# EAGLE board fpga_board_test (EAGLE 9.5.1), part 1 of 2
VERSION: v3.3
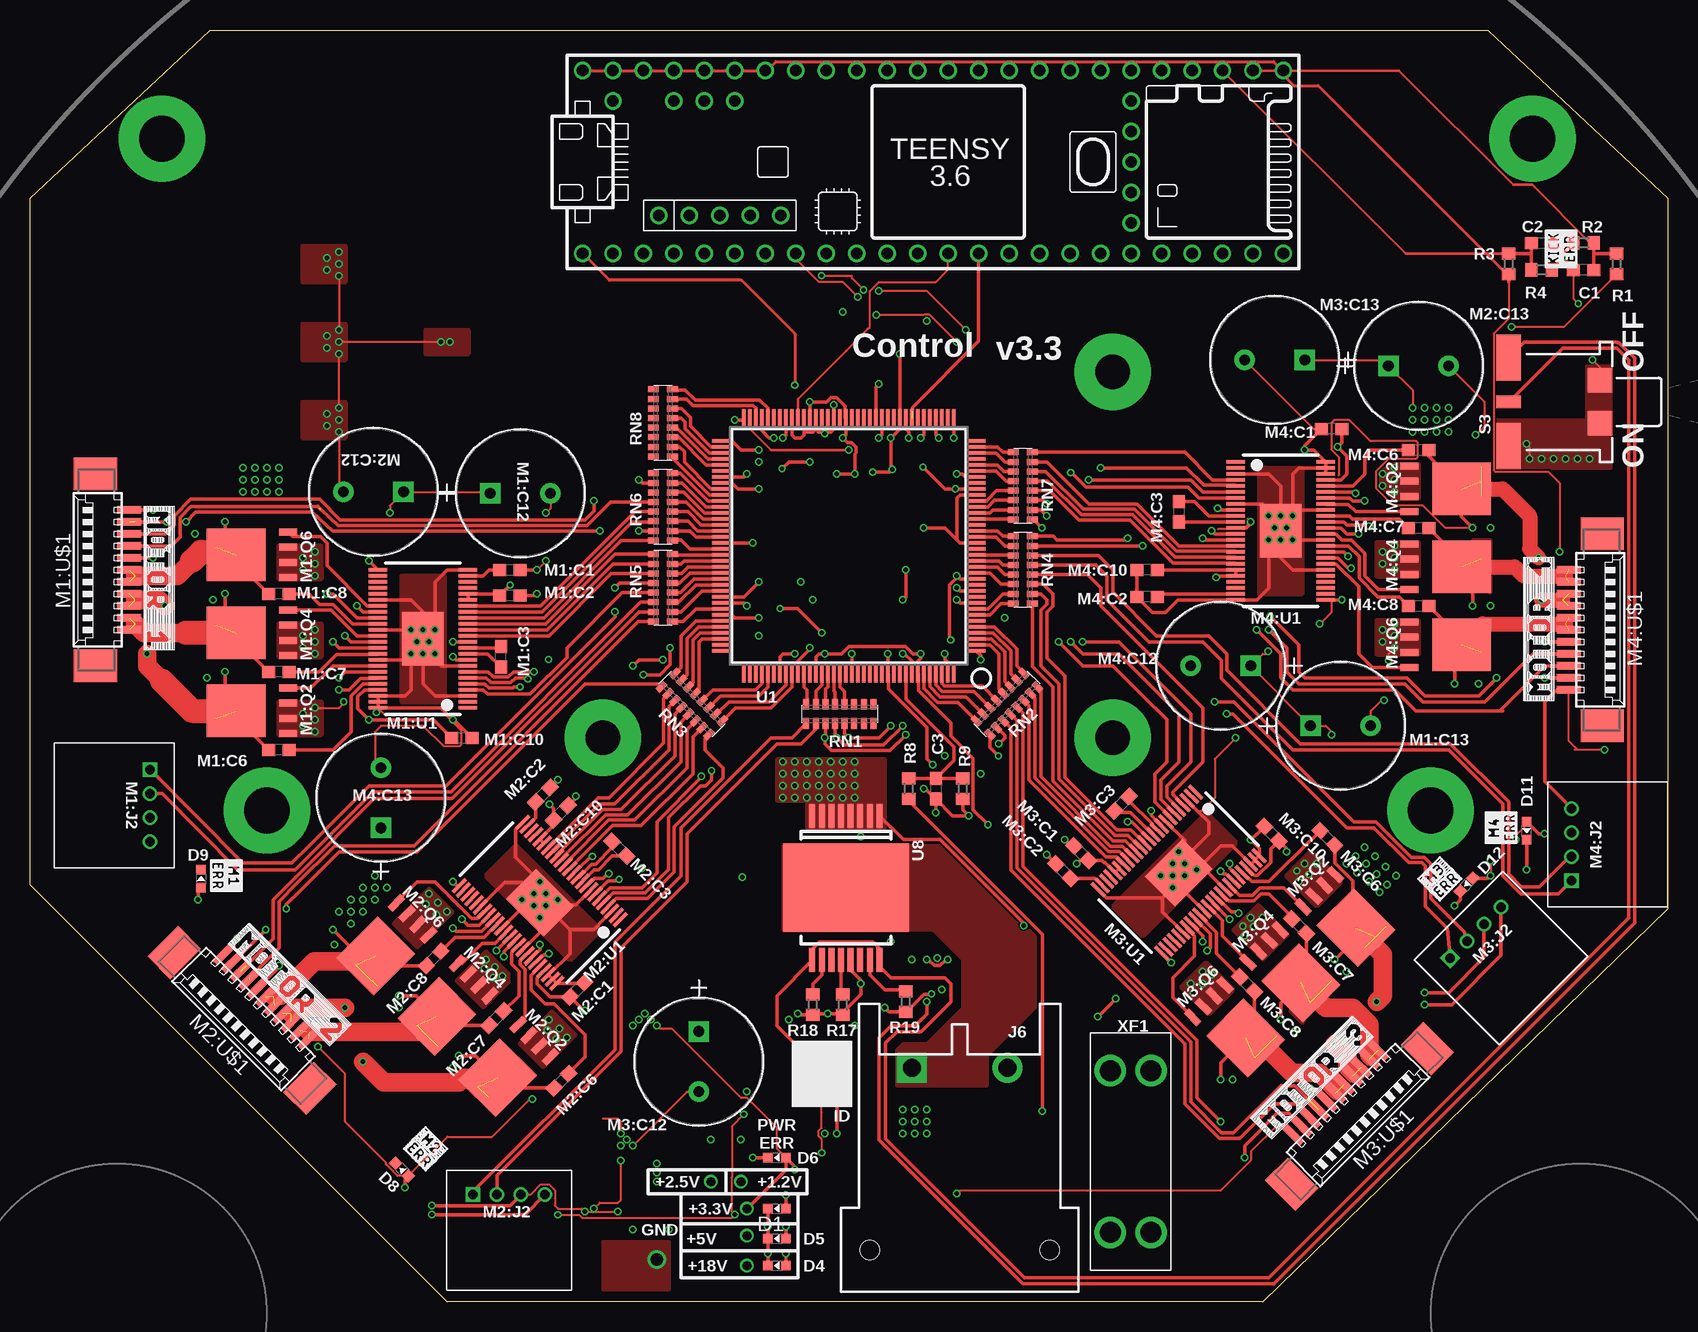
[diagram p0: board, top side]
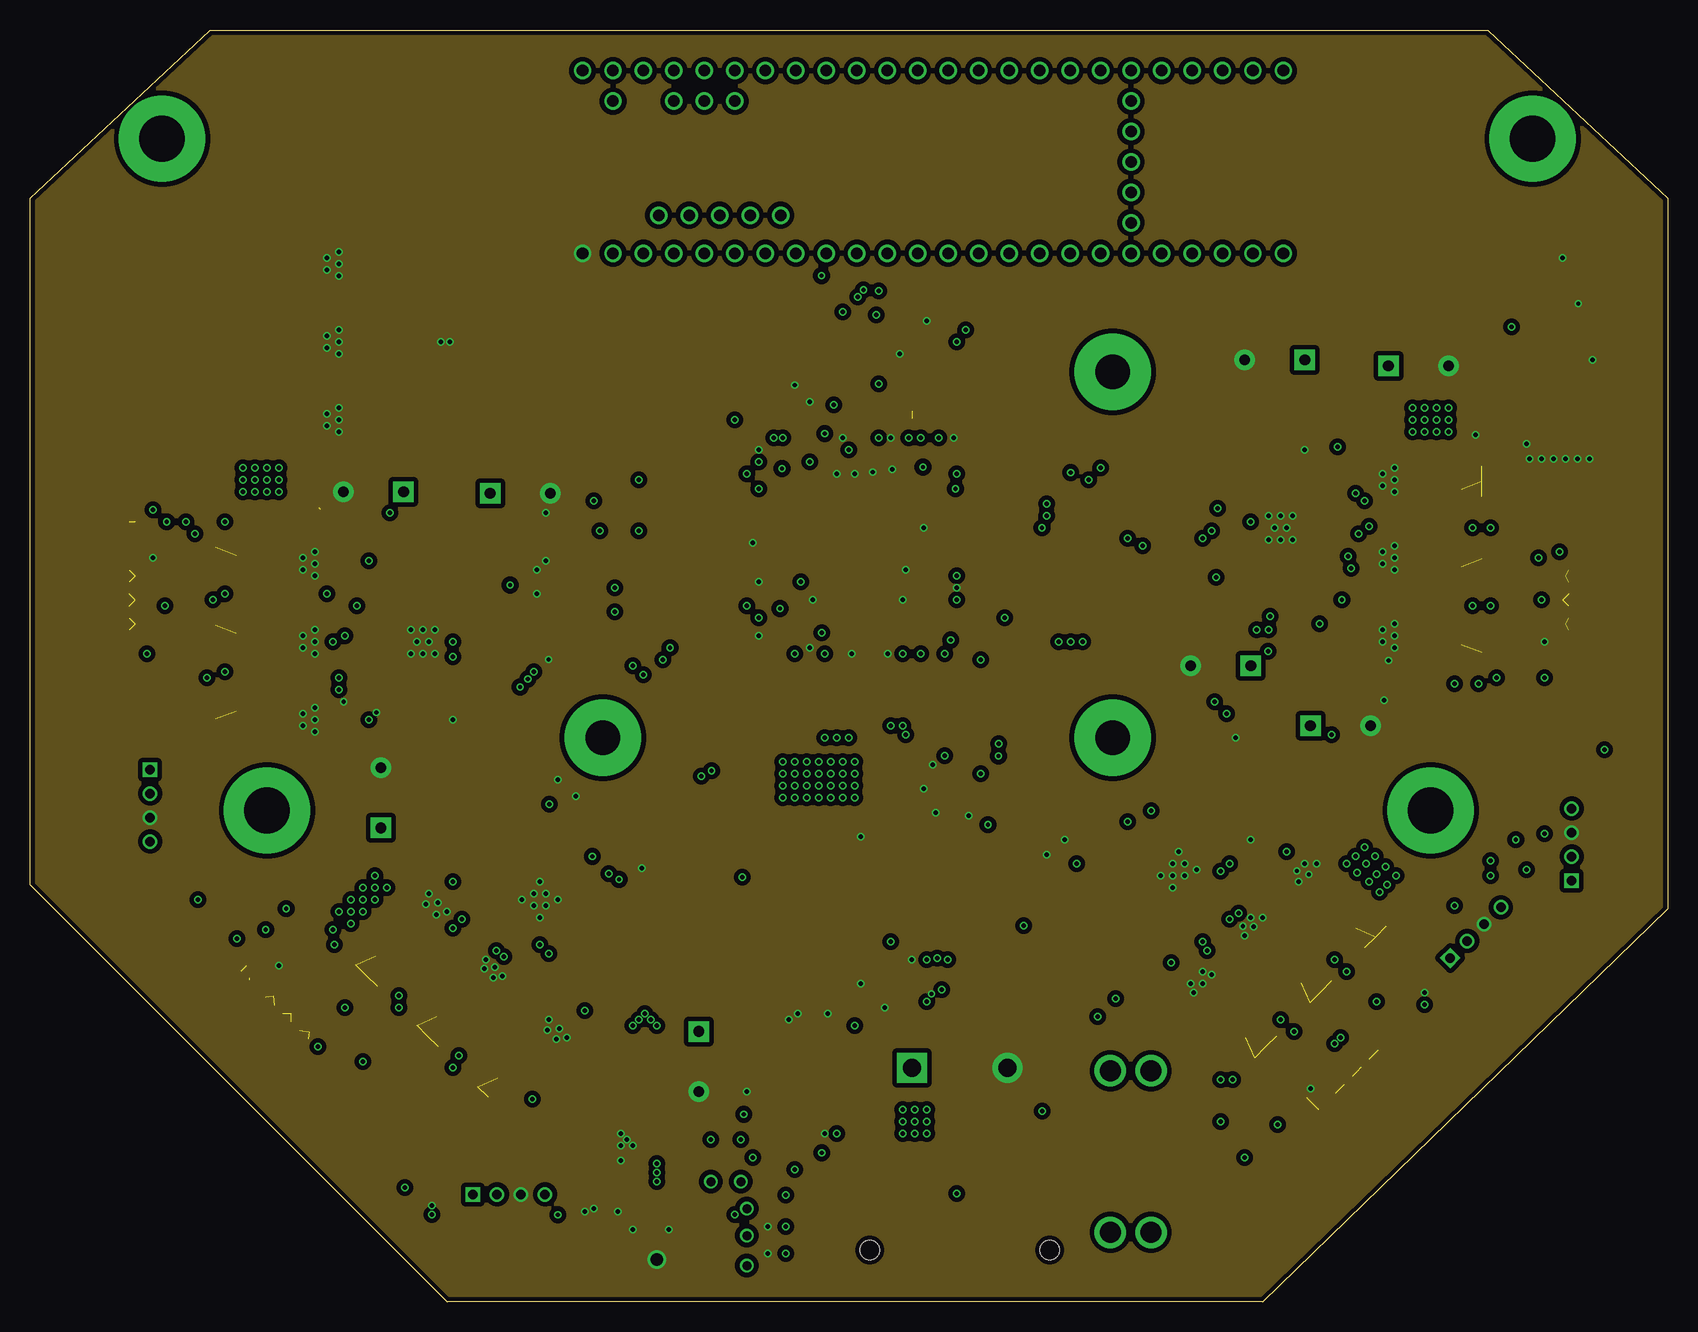
[diagram p1: board, inner layer GND]
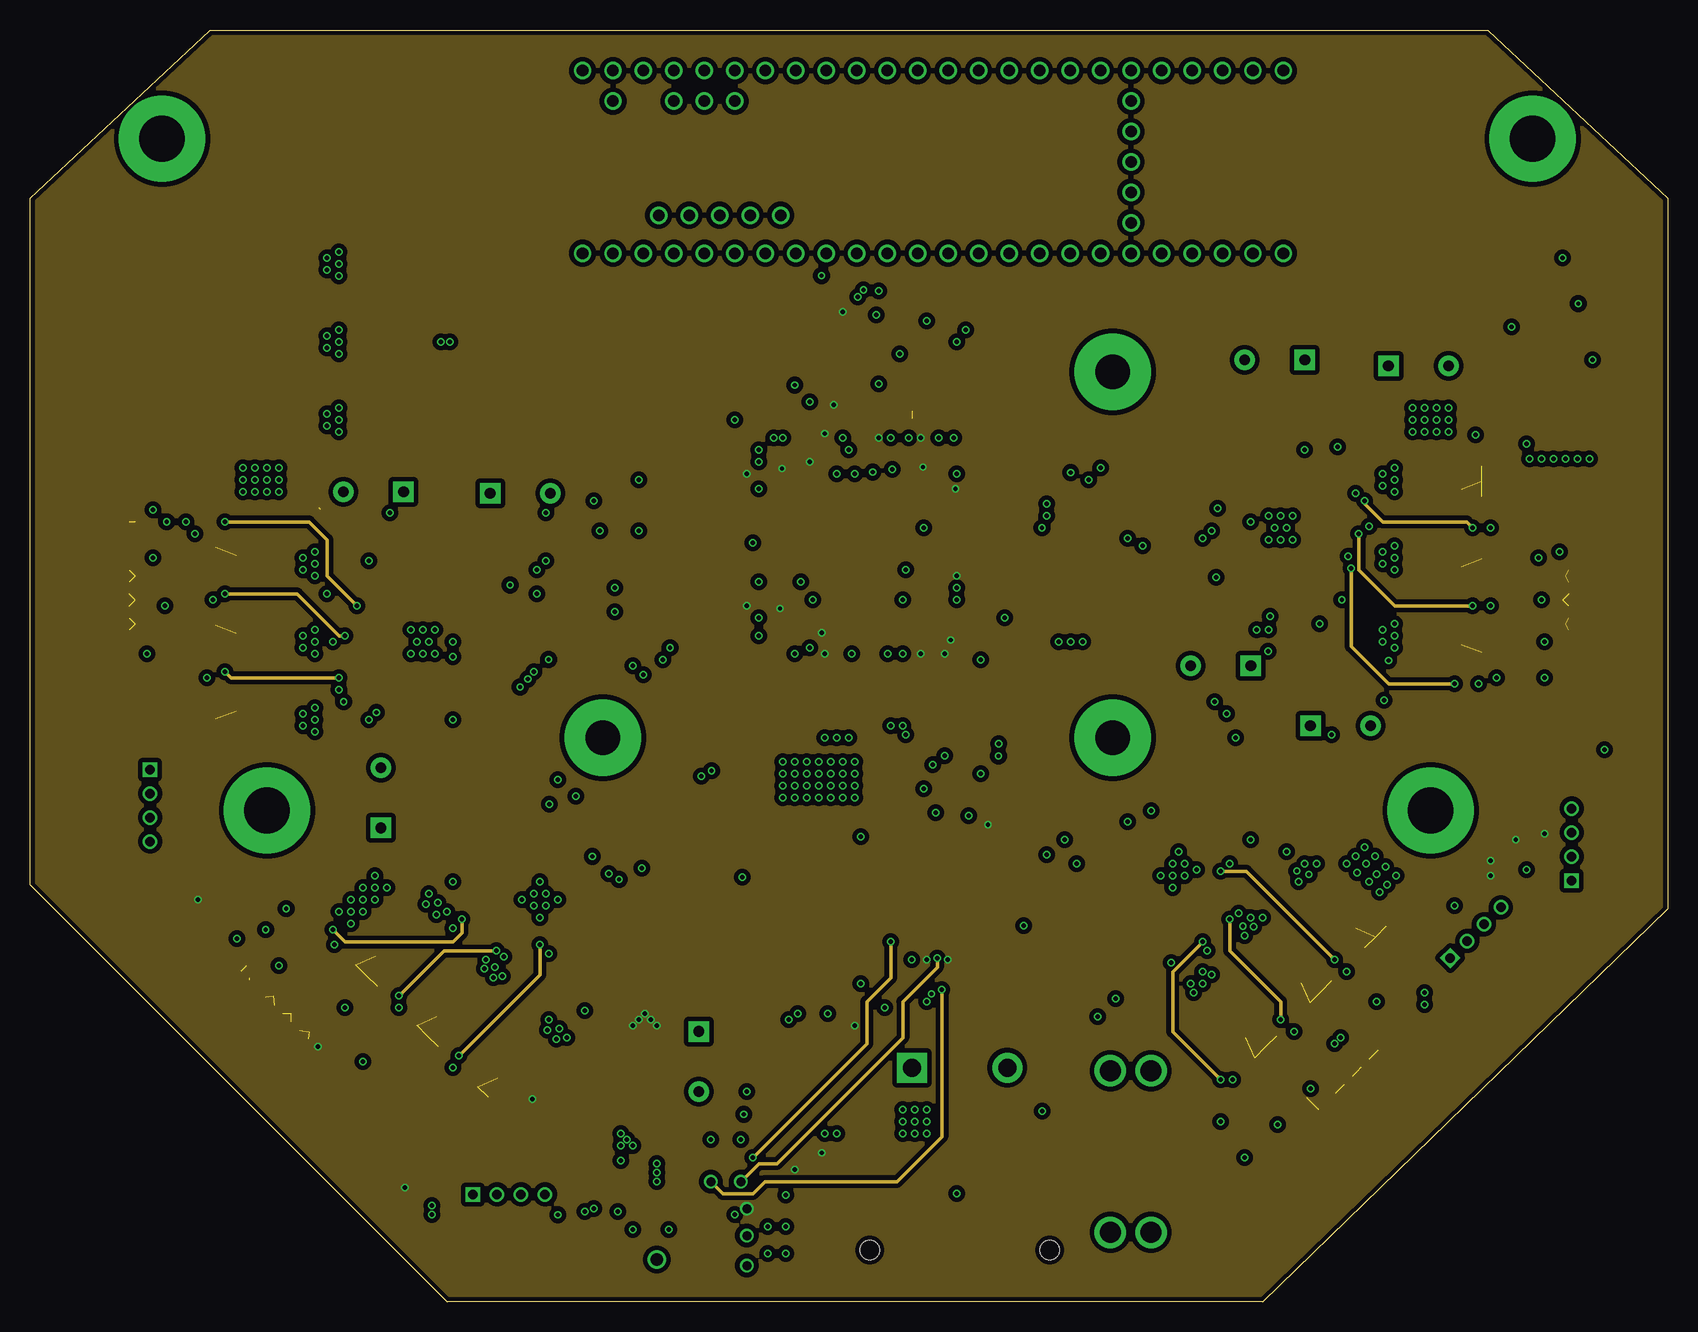
[diagram p2: board, inner layer 3v3]
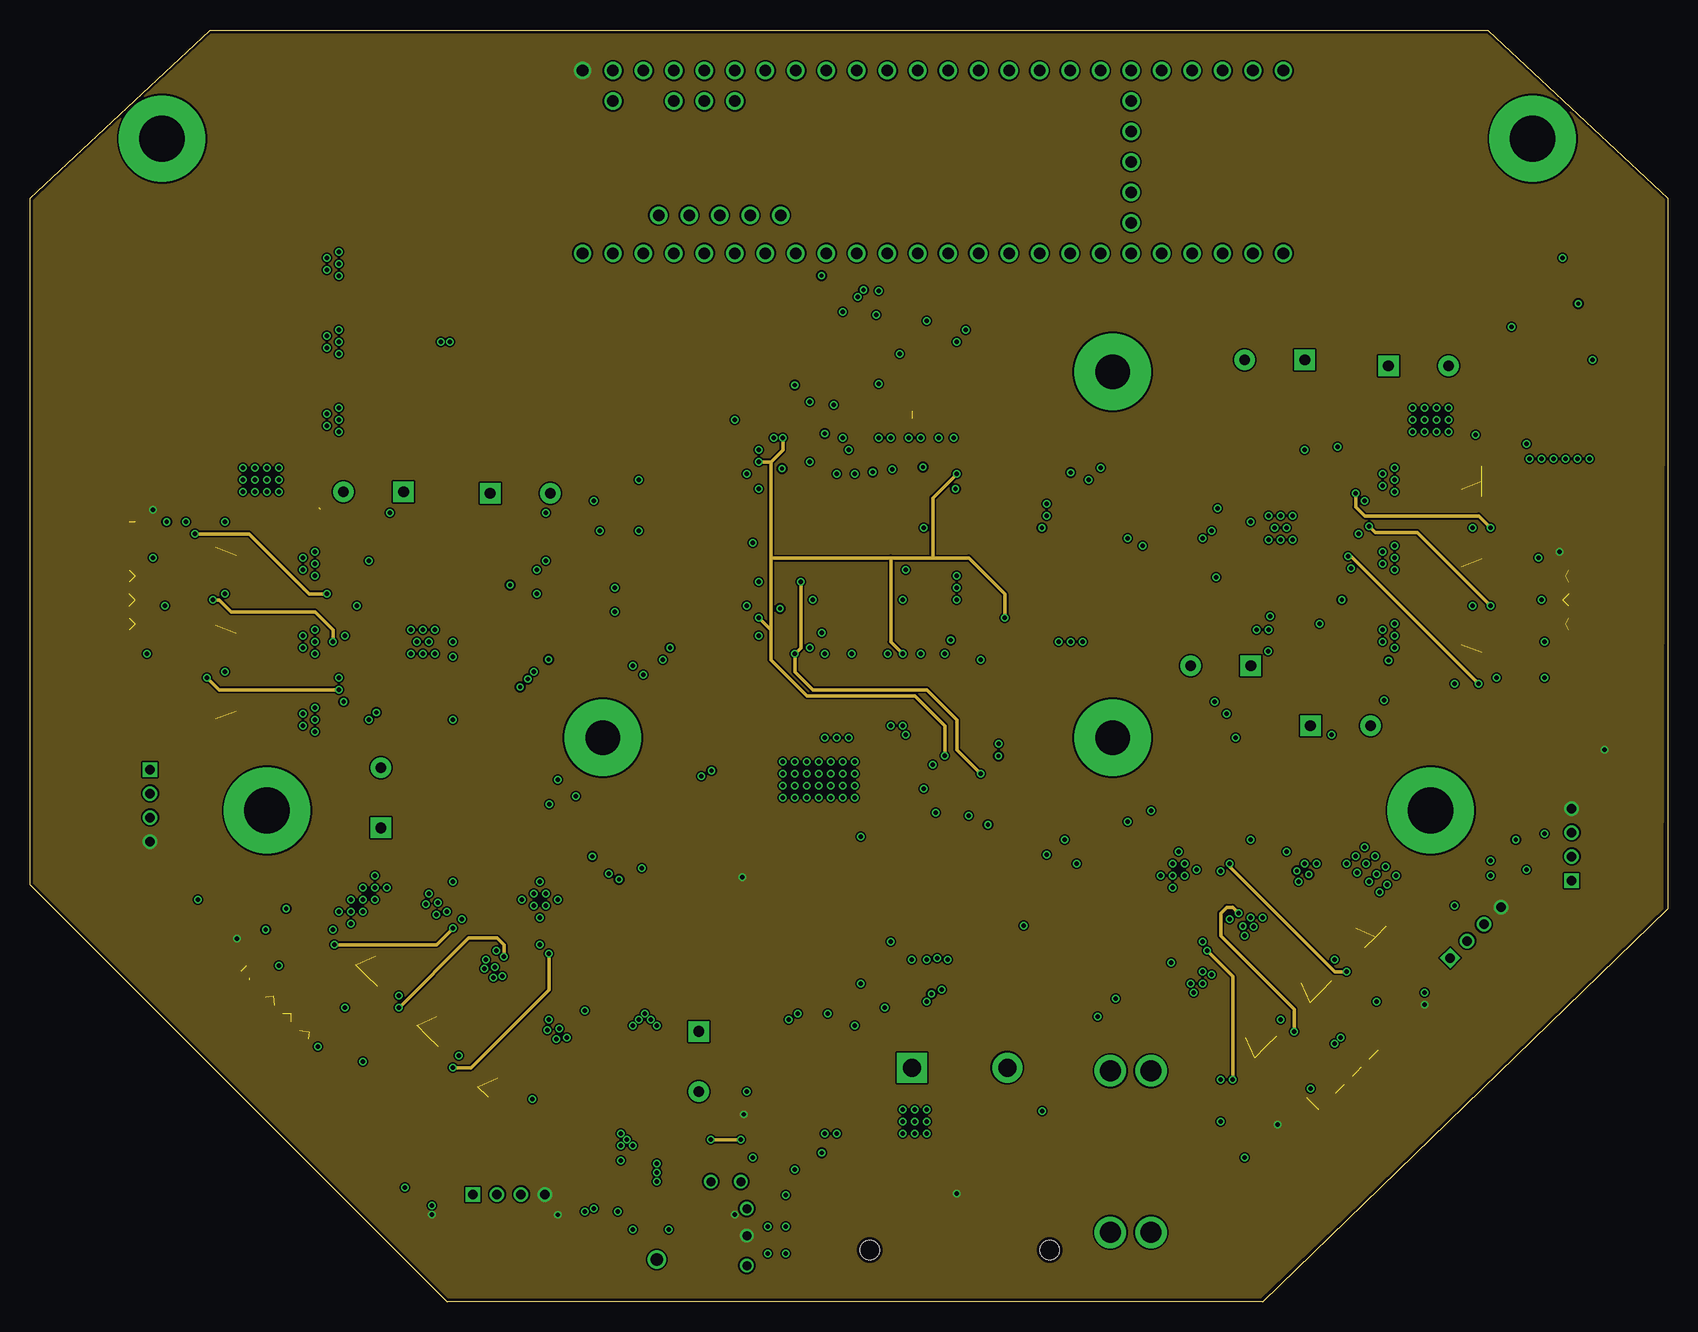
[diagram p3: board, inner layer 5v]
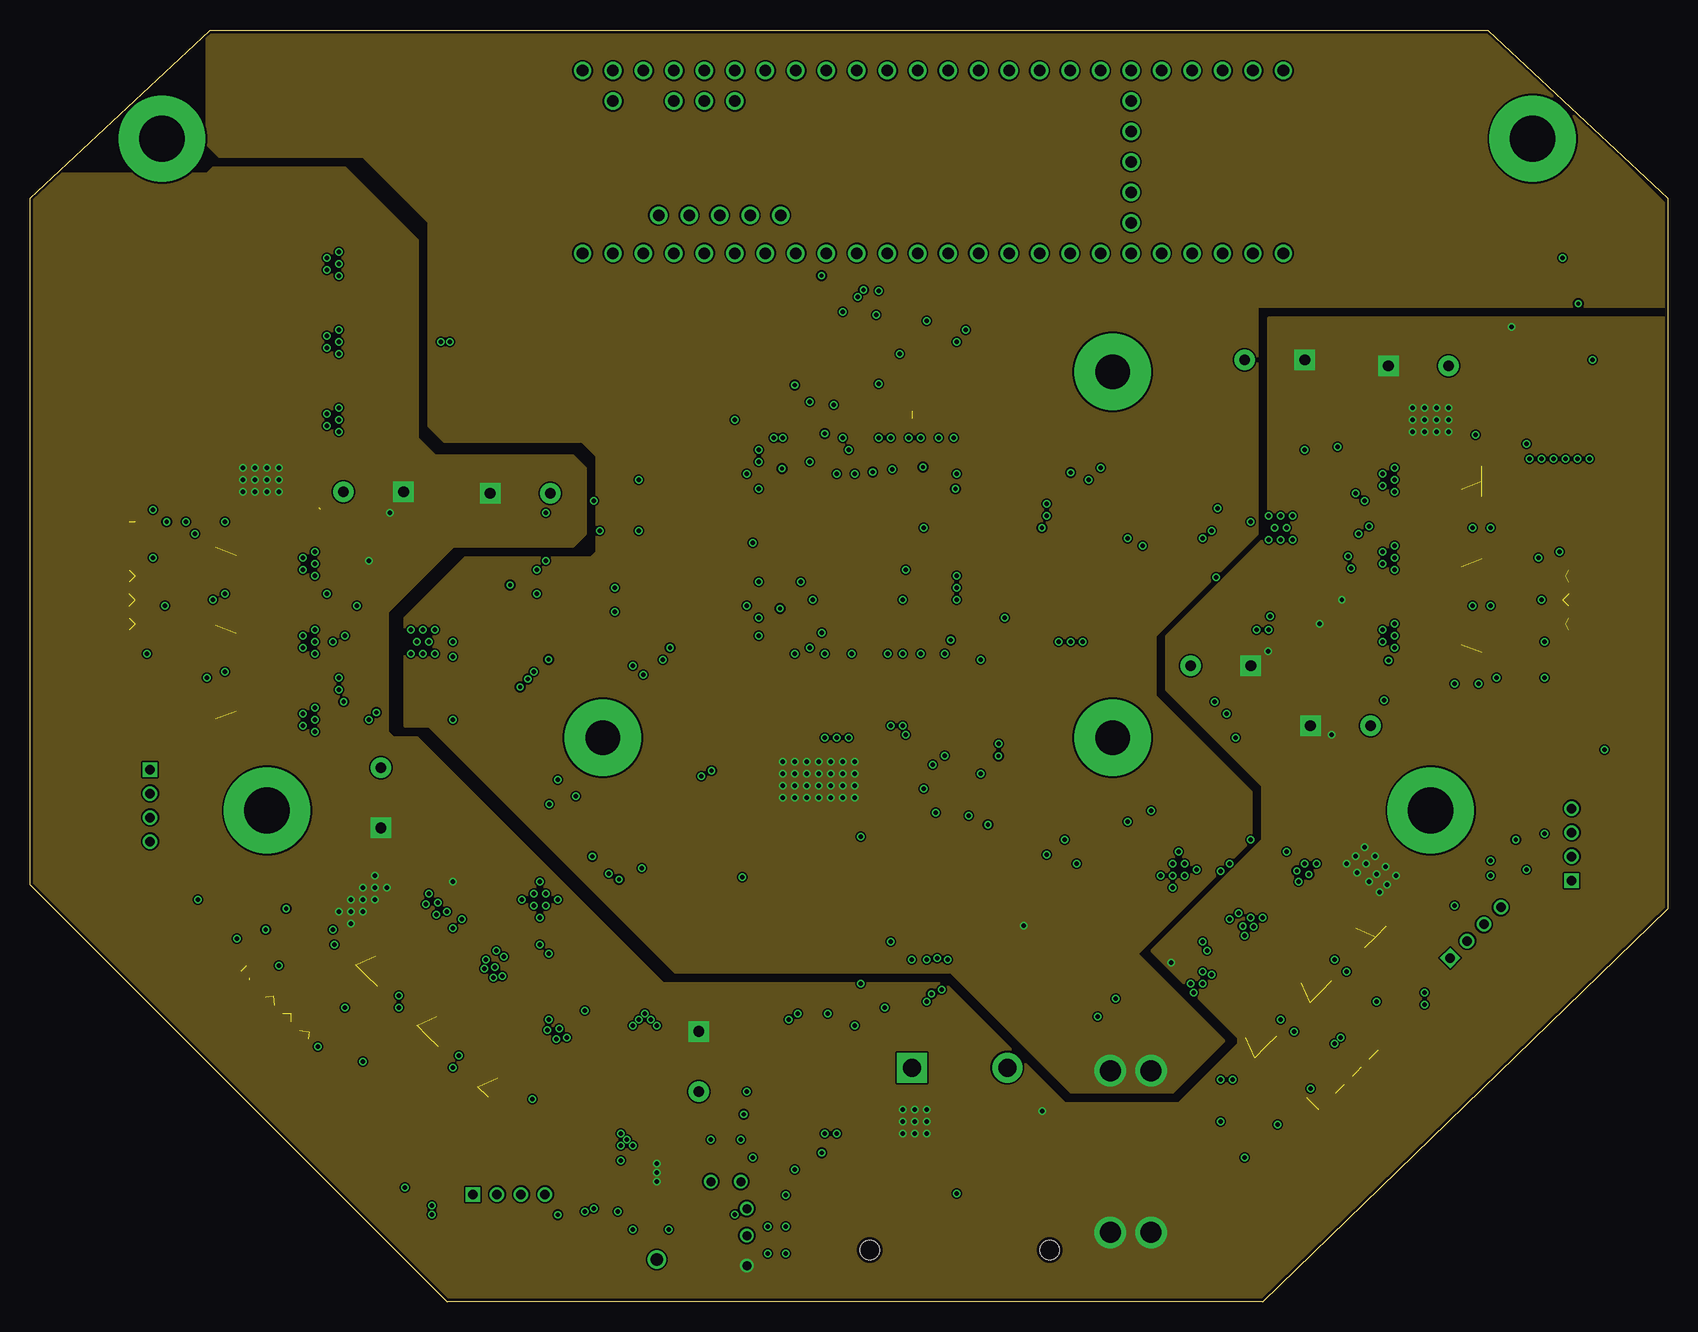
[diagram p4: board, inner layer Vbatt]
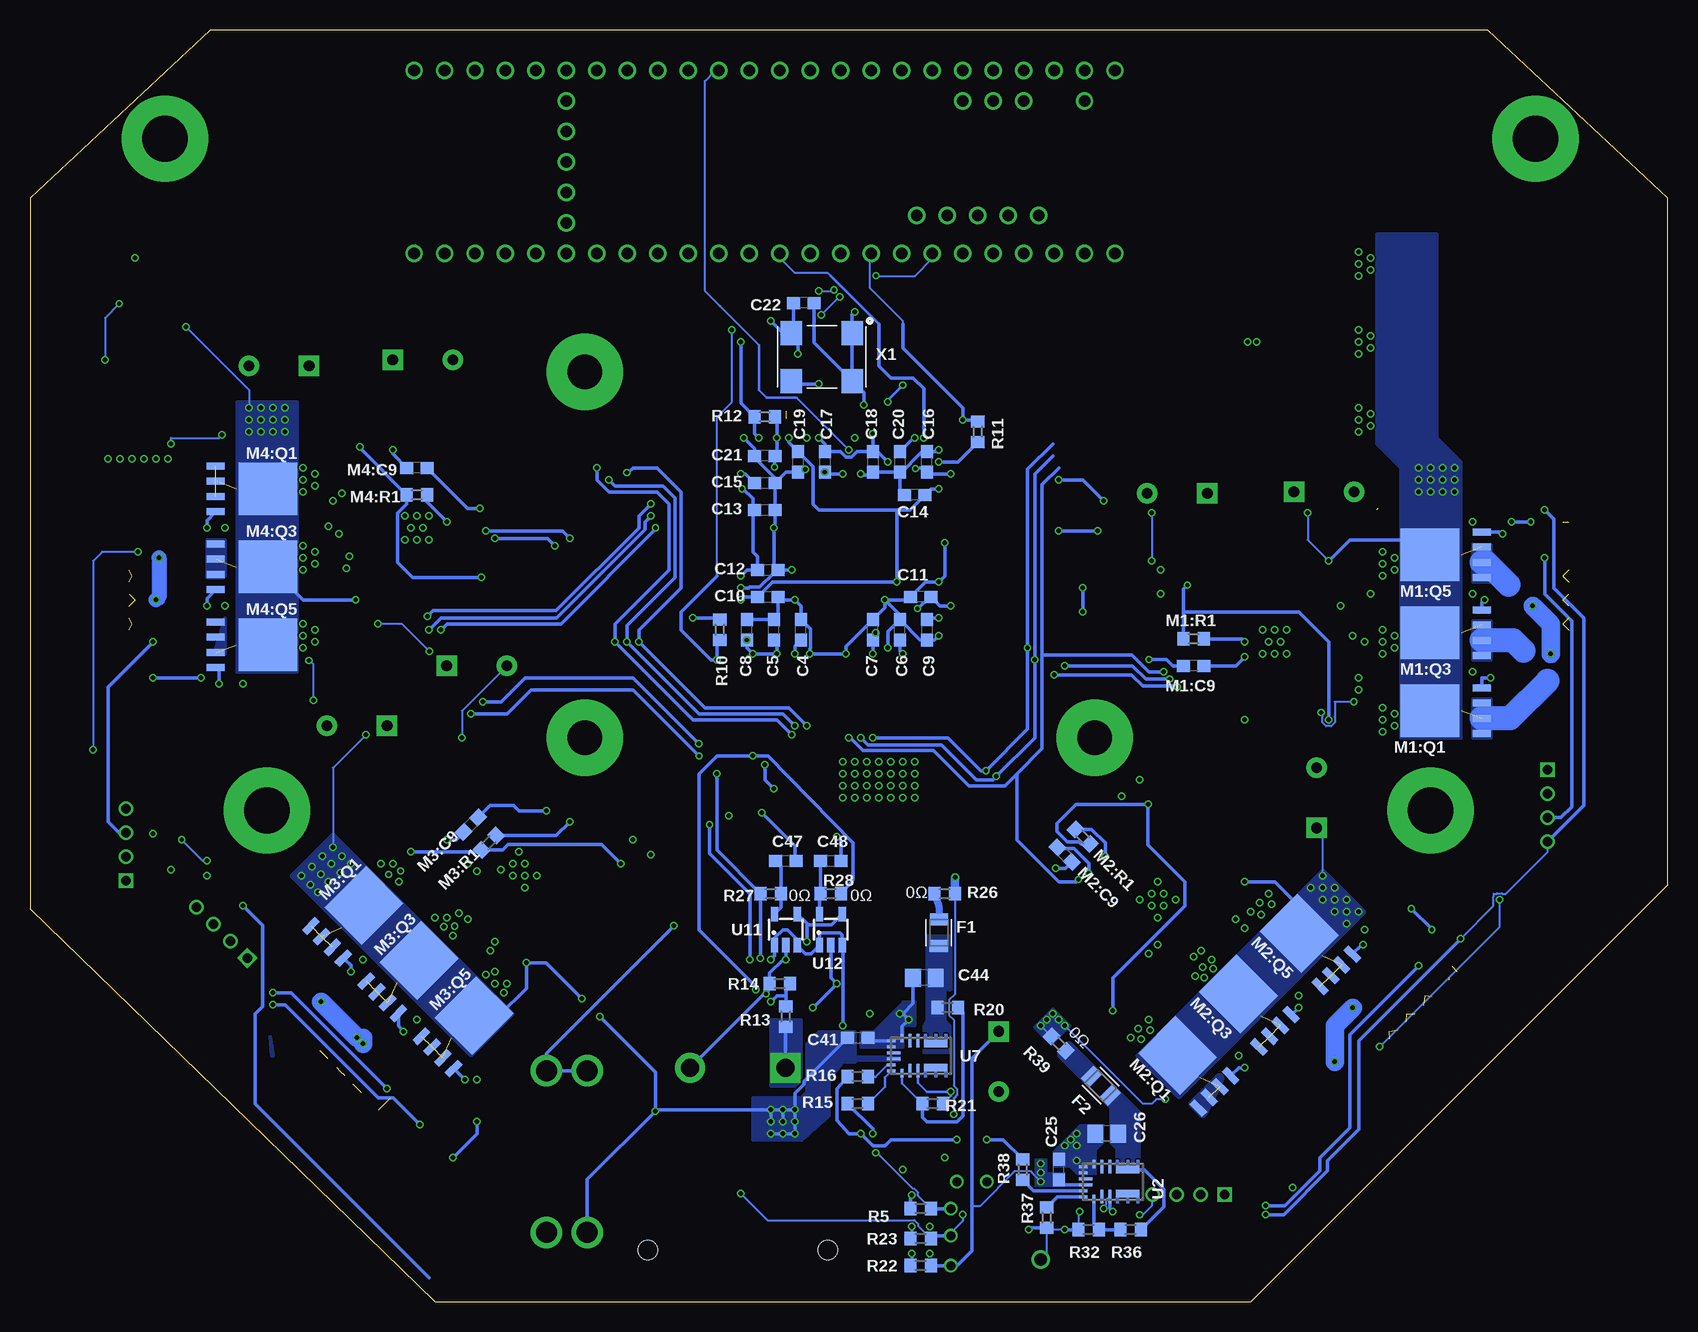
[diagram p5: board, bottom side, seen from below]

Size 136.5 x 106 mm. Coordinates in mm from the lower left corner, seen from the top.
Outline: 102.75,0 34.75,0 0,34.75 0,92 15,106 121.5,106 136.5,92 136.5,32.75 102.75,0
Copper layers (1+2*3+14*15+16): Top 0.018mm / dielectric 0.2mm / GND 0.035mm / dielectric 0.36mm / 3v3 0.035mm / dielectric 0.3mm / 5v 0.035mm / dielectric 0.15mm / Vbatt 0.035mm / dielectric 0.2mm / Bottom 0.018mm
Design rules "eC_6Layer_PClass6_BaseCopperO18-I35_eCDefault *": minimum track width 0.15mm, minimum drill 0.35mm, track to track 0.15mm, track to pad 0.15mm, pad to pad 0.15mm, via to via 0.15mm, smd to smd 0mil, copper to edge 0.25mm, drill to drill 0.35mm, minimum pad ring 0.175mm, minimum via ring 0.125mm, stop-mask expansion 0mil, vias tented up to drill 0.45mm, thermal gap 0.2mm

## Footprints (pad centres in the part's own frame; a part is rotated, then mirrored left to right if it is on the bottom)
C0603 = smd 1.1 x 1: 1 -0.85,0; 2 0.85,0
C0805 = smd 1.3 x 1.5: 1 -0.95,0; 2 0.95,0
CHIP-LED0603 = smd 0.8 x 0.8: A 0,-0.75; C 0,0.75
FUSC2113X75 = smd 1 x 1.52: 1 -1.1,0 | smd 1 x 1.5: 2 1.1,0
DF22-2-H = drill 1.5 pad 2.5 square: 1 3.96,0 | drill 1.5 pad 2.5: 2 -3.96,0 | hole 1.6: -7.5,15.2; 7.5,15.2
CAP_PAN_10X12.5 = drill 0.914 pad 1.676 square: 1 -5.004,0 | drill 0.914 pad 1.676: 2 0,0
2MM-4-H = drill 0.8 square: 1 -3,0 | drill 0.8: 2 -1,0; 3 1,0; 4 3,0
PQFN_5X6_E = smd 1.5 x 0.6: 1 -3.02,1.905; 2 -3.02,0.635; 3 -3.02,-0.635; 4 -3.02,-1.905 | smd 4.895 x 4.41: 5678 1.323,0
R0603 = smd 1 x 1.1: 1 -0.85,0; 2 0.85,0
TSSOP-48_PAD = smd 0.3 x 1.55: 1 -5.75,-3.75; 2 -5.25,-3.75; 3 -4.75,-3.75; 4 -4.25,-3.75; 5 -3.75,-3.75; 6 -3.25,-3.75; 7 -2.75,-3.75; 8 -2.25,-3.75; 9 -1.75,-3.75; 10 -1.25,-3.75; 11 -0.75,-3.75; 12 -0.25,-3.75; 13 0.25,-3.75; 14 0.75,-3.75; 15 1.25,-3.75; 16 1.75,-3.75; 17 2.25,-3.75; 18 2.75,-3.75; 19 3.25,-3.75; 20 3.75,-3.75; 21 4.25,-3.75; 22 4.75,-3.75; 23 5.25,-3.75; 24 5.75,-3.75; 25 5.75,3.75; 26 5.25,3.75; 27 4.75,3.75; 28 4.25,3.75; 29 3.75,3.75; 30 3.25,3.75; 31 2.75,3.75; 32 2.25,3.75; 33 1.75,3.75; 34 1.25,3.75; 35 0.75,3.75; 36 0.25,3.75; 37 -0.25,3.75; 38 -0.75,3.75; 39 -1.25,3.75; 40 -1.75,3.75; 41 -2.25,3.75; 42 -2.75,3.75; 43 -3.25,3.75; 44 -3.75,3.75; 45 -4.25,3.75; 46 -4.75,3.75; 47 -5.25,3.75; 48 -5.75,3.75 | smd 4.42 x 3.483: PAD 0,0
GEN3CON = smd 0.61 x 2: 1 5,-2; 2 4,-2; 3 3,-2; 4 2,-2; 5 1,-2; 7 -1,-2; 8 -2,-2; 9 -3,-2; 10 -4,-2; 11 -5,-2 | smd 0.6 x 2: 6 0,-2 | smd 2.68 x 3.6: S1 8,0.8; S2 -8,0.8
RA-8_2506 = smd 0.5 x 0.9: 1 -2.8,-0.8; 2 -2,-0.8; 3 -1.2,-0.8; 4 -0.4,-0.8; 5 0.4,-0.8; 6 1.2,-0.8; 7 2,-0.8; 8 2.8,-0.8; 9 2.8,0.8; 10 2,0.8; 11 1.2,0.8; 12 0.4,0.8; 13 -0.4,0.8; 14 -1.2,0.8; 15 -2,0.8; 16 -2.8,0.8
34EWMSP12M6RT = smd 3.81 x 2.03: 1 -3.685,0; 3 3.685,0 | smd 1.02 x 2.03: 2 0,0 | smd 2.03 x 2.03: LEG1 -1.78,7.62; LEG3 1.78,7.62
TQFP144 = smd 0.3 x 1.6: 1 -8.75,-10.6; 2 -8.25,-10.6; 3 -7.75,-10.6; 4 -7.25,-10.6; 5 -6.75,-10.6; 6 -6.25,-10.6; 7 -5.75,-10.6; 8 -5.25,-10.6; 9 -4.75,-10.6; 10 -4.25,-10.6; 11 -3.75,-10.6; 12 -3.25,-10.6; 13 -2.75,-10.6; 14 -2.25,-10.6; 15 -1.75,-10.6; 16 -1.25,-10.6; 17 -0.75,-10.6; 18 -0.25,-10.6; 19 0.25,-10.6; 20 0.75,-10.6; 21 1.25,-10.6; 22 1.75,-10.6; 23 2.25,-10.6; 24 2.75,-10.6; 25 3.25,-10.6; 26 3.75,-10.6; 27 4.25,-10.6; 28 4.75,-10.6; 29 5.25,-10.6; 30 5.75,-10.6; 31 6.25,-10.6; 32 6.75,-10.6; 33 7.25,-10.6; 34 7.75,-10.6; 35 8.25,-10.6; 36 8.75,-10.6; 73 8.75,10.6; 74 8.25,10.6; 75 7.75,10.6; 76 7.25,10.6; 77 6.75,10.6; 78 6.25,10.6; 79 5.75,10.6; 80 5.25,10.6; 81 4.75,10.6; 82 4.25,10.6; 83 3.75,10.6; 84 3.25,10.6; 85 2.75,10.6; 86 2.25,10.6; 87 1.75,10.6; 88 1.25,10.6; 89 0.75,10.6; 90 0.25,10.6; 91 -0.25,10.6; 92 -0.75,10.6; 93 -1.25,10.6; 94 -1.75,10.6; 95 -2.25,10.6; 96 -2.75,10.6; 97 -3.25,10.6; 98 -3.75,10.6; 99 -4.25,10.6; 100 -4.75,10.6; 101 -5.25,10.6; 102 -5.75,10.6; 103 -6.25,10.6; 104 -6.75,10.6; 105 -7.25,10.6; 106 -7.75,10.6; 107 -8.25,10.6; 108 -8.75,10.6 | smd 1.6 x 0.3: 37 10.6,-8.75; 38 10.6,-8.25; 39 10.6,-7.75; 40 10.6,-7.25; 41 10.6,-6.75; 42 10.6,-6.25; 43 10.6,-5.75; 44 10.6,-5.25; 45 10.6,-4.75; 46 10.6,-4.25; 47 10.6,-3.75; 48 10.6,-3.25; 49 10.6,-2.75; 50 10.6,-2.25; 51 10.6,-1.75; 52 10.6,-1.25; 53 10.6,-0.75; 54 10.6,-0.25; 55 10.6,0.25; 56 10.6,0.75; 57 10.6,1.25; 58 10.6,1.75; 59 10.6,2.25; 60 10.6,2.75; 61 10.6,3.25; 62 10.6,3.75; 63 10.6,4.25; 64 10.6,4.75; 65 10.6,5.25; 66 10.6,5.75; 67 10.6,6.25; 68 10.6,6.75; 69 10.6,7.25; 70 10.6,7.75; 71 10.6,8.25; 72 10.6,8.75; 109 -10.6,8.75; 110 -10.6,8.25; 111 -10.6,7.75; 112 -10.6,7.25; 113 -10.6,6.75; 114 -10.6,6.25; 115 -10.6,5.75; 116 -10.6,5.25; 117 -10.6,4.75; 118 -10.6,4.25; 119 -10.6,3.75; 120 -10.6,3.25; 121 -10.6,2.75; 122 -10.6,2.25; 123 -10.6,1.75; 124 -10.6,1.25; 125 -10.6,0.75; 126 -10.6,0.25; 127 -10.6,-0.25; 128 -10.6,-0.75; 129 -10.6,-1.25; 130 -10.6,-1.75; 131 -10.6,-2.25; 132 -10.6,-2.75; 133 -10.6,-3.25; 134 -10.6,-3.75; 135 -10.6,-4.25; 136 -10.6,-4.75; 137 -10.6,-5.25; 138 -10.6,-5.75; 139 -10.6,-6.25; 140 -10.6,-6.75; 141 -10.6,-7.25; 142 -10.6,-7.75; 143 -10.6,-8.25; 144 -10.6,-8.75
MPM3620GQV-P = smd 0.7 x 0.25: 1 -1.45,1.55; 12 1.45,1.55 | smd 1.1 x 0.25: 2 -1.25,0.9; 3 -1.25,0.25; 10 1.25,0.25; 11 1.25,0.9 | smd 0.25 x 0.7: 13 1.25,2.45; 14 0.75,2.45; 17 -0.75,2.45; 18 -1.25,2.45 | smd 0.25 x 1.1: 15 0.25,2.25; 16 -0.25,2.25 | smd 0.6 x 1.95: 456 -1,-1.25; 789 1,-1.25
POWERSO-16 = smd 0.5 x 2: 1 -2.8,-6; 2 -2,-6; 3 -1.2,-6; 4 -0.4,-6; 5 0.4,-6; 6 1.2,-6; 7 2,-6; 8 2.8,-6; 9 2.8,6; 10 2,6; 11 1.2,6; 12 0.4,6; 13 -0.4,6; 14 -1.2,6; 15 -2,6; 16 -2.8,6 | smd 10.5 x 7.4: 17 0,0
SOT-23-5 = smd 0.6 x 1.2: 1 -0.95,-1.306; 2 0,-1.306; 3 0.95,-1.306; 4 0.95,1.306; 5 -0.95,1.306
TEENSY_3.5/3.6 = drill 0.965: 0/RX -25.4,-7.62; 1/TX -22.86,-7.62; 2 -20.32,-7.62; 3/CANTX -17.78,-7.62; 3V3 7.62,-7.62; 3V3_2 17.78,-2.54; 3V3_LO -22.86,7.62; 4/CANRX -15.24,-7.62; 5 -12.7,-7.62; 6 -10.16,-7.62; 7 -7.62,-7.62; 8 -5.08,-7.62; 9/CS -2.54,-7.62; 10/CS 0,-7.62; 11/MOSI 2.54,-7.62; 12/MISO 5.08,-7.62; 13/SCK 5.08,7.62; 14/A0 2.54,7.62; 15/A1 0,7.62; 16/A2 -2.54,7.62; 17/A3 -5.08,7.62; 18/A4/SDA -7.62,7.62; 19/A5/SCL -10.16,7.62; 20/A6 -12.7,7.62; 21/A7 -15.24,7.62; 21/DAC0 12.7,7.62; 22/A8 -17.78,7.62; 23/A9 -20.32,7.62; 24 10.16,-7.62; 25 12.7,-7.62; 26 15.24,-7.62; 27 17.78,-7.62; 28 20.32,-7.62; 29 22.86,-7.62; 30 25.4,-7.62; 31/A12 27.94,-7.62; 32/A13 30.48,-7.62; 33/A14 30.48,7.62; 34/A15 27.94,7.62; 35/A16 25.4,7.62; 36/A17 22.86,7.62; 37/A18 20.32,7.62; 38/A19 17.78,7.62; 39/A20 15.24,7.62; A10 -17.78,5.08; A11 -15.24,5.08; A22/DAC1 10.16,7.62; AGND -25.4,7.62; AREF -20.32,5.08; GND -27.94,-7.62; GND2 7.62,7.62; GND3 17.78,0; PROG 17.78,2.54; RESET 17.78,5.08; U5V -21.59,-4.445; UD+ -16.51,-4.445; UD- -19.05,-4.445; UGND1 -13.97,-4.445; UGND2 -11.43,-4.445; VBAT 17.78,-5.08; VIN -27.94,7.62; VUSB -25.4,5.08
ASV = smd 1.8 x 2: 1 -2.54,-2; 2 2.54,-2; 3 2.54,2; 4 -2.54,2
3557-2 = drill 1.75: 1 -6.735,1.7; 2 -6.735,-1.7; 3 6.735,-1.7; 4 6.735,1.7

## Placement (x,y rotation side)
C1  0.1uF 50V  [C0603]  129.5,86 180 top
C2  0.1uF  [C0603]  126,88.25 0 top
C3  0.1uF  [C0603]  75.5,42.75 270 top
C4  0.1uF  [C0603]  72.25,56 90 bottom
C5  0.1uF  [C0603]  74.5,56 90 bottom
C6  0.1uF  [C0603]  64,56 90 bottom
C7  0.1uF  [C0603]  66.25,56 90 bottom
C8  0.1uF  [C0603]  76.75,56 90 bottom
C9  0.1uF  [C0603]  61.75,56 270 bottom
C10  0.1uF  [C0603]  75,58.75 0 bottom
C11  0.1uF  [C0603]  62.25,58.75 180 bottom
C12  0.1uF  [C0603]  75,61 0 bottom
C13  0.1uF  [C0603]  75.25,66 0 bottom
C14  0.1uF  [C0603]  62.75,67.25 180 bottom
C15  0.1uF  [C0603]  75.25,68.25 0 bottom
C16  0.1uF  [C0603]  61.75,70 90 bottom
C17  0.1uF  [C0603]  70.25,70 270 bottom
C18  0.1uF  [C0603]  66.25,70 270 bottom
C19  0.1uF  [C0603]  72.5,70 270 bottom
C20  0.1uF  [C0603]  64,70 270 bottom
C21  0.1uF  [C0603]  75.25,70.5 180 bottom
C22  0.1uF  [C0603]  72,83.25 180 bottom
C25  GRM188R6YA106MA73D  [C0603]  50.75,11 90 bottom
C26  22uF 16V  [C0805]  46.75,14 180 bottom
C41  GRM188R6YA106MA73D  [C0603]  67.5,22 0 bottom
C44  22uF 16V  [C0805]  61.95,27 180 bottom
C47  1uF  [C0603]  73.5,36.75 0 bottom
C48  1uF  [C0603]  69.75,36.75 0 bottom
D1  GREEN  [CHIP-LED0603]  62.25,7.75 90 top
D4  GREEN  [CHIP-LED0603]  62.25,3 90 top
D5  GREEN  [CHIP-LED0603]  62.25,5.25 90 top
D6  RED  [CHIP-LED0603]  62.25,12 90 top
D8  RED  [CHIP-LED0603]  31,11 45 top
D9  RED  [CHIP-LED0603]  14.25,35.25 0 top
D11  RED  [CHIP-LED0603]  124.75,39.25 180 top
D12  RED  [CHIP-LED0603]  119.75,34.75 136 top
F1  0805L200SLTHYR  [FUSC2113X75]  60.75,30.75 90 bottom
F2  0805L200SLTHYR  [FUSC2113X75]  47.25,18 135 bottom
J6  DF22-2  [DF22-2-H]  77.5,19.5 180 top
M1:C1  1uF  [C0603]  40,58.88 0 top
M1:C2  1uF  [C0603]  40,61 0 top
M1:C3  0.022uF 50V  [C0603]  39.25,53.75 90 top
M1:C6  0.1uF 50V  [C0603]  20.75,46 180 top
M1:C7  0.1uF 50V  [C0603]  20.75,52.5 180 top
M1:C8  0.1uF 50V  [C0603]  20.75,59 180 top
M1:C9  2.2uF 50V  [C0603]  39.5,53 180 bottom
M1:C10  0.1uF 50V  [C0603]  36,47 0 top
M1:C12  ECA-1HHG221  [CAP_PAN_10X12.5]  43.38,67.38 0 top
M1:C13  ECA-1HHG221  [CAP_PAN_10X12.5]  111.75,48 0 top
M1:J2  4-PIN_2MM-H  [2MM-4-H]  10,41.35 270 top
M1:Q1  IRFH7545  [PQFN_5X6_E]  18.5,49.25 180 bottom
M1:Q2  IRFH7545  [PQFN_5X6_E]  18.5,49.25 180 top
M1:Q3  IRFH7545  [PQFN_5X6_E]  18.5,55.75 180 bottom
M1:Q4  IRFH7545  [PQFN_5X6_E]  18.5,55.75 180 top
M1:Q5  IRFH7545  [PQFN_5X6_E]  18.5,62.25 180 bottom
M1:Q6  IRFH7545  [PQFN_5X6_E]  18.5,62.25 180 top
M1:R1  10k  [R0603]  39.5,55.25 0 bottom
M1:U1  DRV8303DCA  [TSSOP-48_PAD]  32.75,55.25 90 top
M1:U$1  MOTORCON  [GEN3CON]  6.25,61 90 top
M2:C1  1uF  [C0603]  45.62,26 45 top
M2:C2  1uF  [C0603]  42.75,42.25 45 top
M2:C3  0.022uF 50V  [C0603]  49.12,37.75 135 top
M2:C6  0.1uF 50V  [C0603]  44.3,18.4 225 top
M2:C7  0.1uF 50V  [C0603]  38.88,23.62 225 top
M2:C8  0.1uF 50V  [C0603]  33.65,28.6 225 top
M2:C9  2.2uF 50V  [C0603]  50.25,37.25 315 bottom
M2:C10  0.1uF 50V  [C0603]  44.25,40.75 45 top
M2:C12  ECA-1HHG221  [CAP_PAN_10X12.5]  26.12,67.5 180 top
M2:C13  ECA-1HHG221  [CAP_PAN_10X12.5]  118.25,78 0 top
M2:J2  4-PIN_2MM-H  [2MM-4-H]  39.92,8.93 0 top
M2:Q1  IRFH7545  [PQFN_5X6_E]  39.9,19.6 135 bottom
M2:Q2  IRFH7545  [PQFN_5X6_E]  39.9,19.6 225 top
M2:Q3  IRFH7545  [PQFN_5X6_E]  34.85,24.7 135 bottom
M2:Q4  IRFH7545  [PQFN_5X6_E]  34.85,24.7 225 top
M2:Q5  IRFH7545  [PQFN_5X6_E]  29.75,29.75 135 bottom
M2:Q6  IRFH7545  [PQFN_5X6_E]  29.75,29.75 225 top
M2:R1  10k  [R0603]  48.75,38.75 135 bottom
M2:U1  DRV8303DCA  [TSSOP-48_PAD]  42.5,33.25 135 top
M2:U$1  MOTORCON  [GEN3CON]  18.25,24 135 top
M3:C1  1uF  [C0603]  87.62,37.38 135 top
M3:C2  1uF  [C0603]  86.12,35.88 135 top
M3:C3  0.022uF 50V  [C0603]  91,41.5 225 top
M3:C6  0.1uF 50V  [C0603]  108.15,38.65 315 top
M3:C7  0.1uF 50V  [C0603]  105.8,31.3 315 top
M3:C8  0.1uF 50V  [C0603]  101.45,26.45 315 top
M3:C9  2.2uF 50V  [C0603]  99.75,39.75 225 bottom
M3:C10  0.1uF 50V  [C0603]  103.5,39 135 top
M3:C12  ECA-1HHG221  [CAP_PAN_10X12.5]  55.75,17.5 270 top
M3:C13  ECA-1HHG221  [CAP_PAN_10X12.5]  101.25,78.5 180 top
M3:J2  4-PIN_2MM-H  [2MM-4-H]  120.5,30.75 45 top
M3:Q1  IRFH7545  [PQFN_5X6_E]  109.6,32.1 45 bottom
M3:Q2  IRFH7545  [PQFN_5X6_E]  109.6,32.1 315 top
M3:Q3  IRFH7545  [PQFN_5X6_E]  105,27.5 45 bottom
M3:Q4  IRFH7545  [PQFN_5X6_E]  105,27.5 315 top
M3:Q5  IRFH7545  [PQFN_5X6_E]  100.4,22.9 45 bottom
M3:Q6  IRFH7545  [PQFN_5X6_E]  100.4,22.9 315 top
M3:R1  10k  [R0603]  98.25,38.25 45 bottom
M3:U1  DRV8303DCA  [TSSOP-48_PAD]  95.75,35.75 225 top
M3:U$1  MOTORCON  [GEN3CON]  110.25,16 225 top
M4:C1  1uF  [C0603]  108.5,72.75 180 top
M4:C2  1uF  [C0603]  93.12,58.75 180 top
M4:C3  0.022uF 50V  [C0603]  95.75,65.85 270 top
M4:C6  0.1uF 50V  [C0603]  115.75,71 0 top
M4:C7  0.1uF 50V  [C0603]  115.75,64.5 0 top
M4:C8  0.1uF 50V  [C0603]  115.75,58 0 top
M4:C9  2.2uF 50V  [C0603]  104.25,69.5 180 bottom
M4:C10  0.1uF 50V  [C0603]  93.12,61 180 top
M4:C12  ECA-1HHG221  [CAP_PAN_10X12.5]  96.75,53 180 top
M4:C13  ECA-1HHG221  [CAP_PAN_10X12.5]  29.25,44.5 90 top
M4:J2  4-PIN_2MM-H  [2MM-4-H]  128.5,38.1 90 top
M4:Q1  IRFH7545  [PQFN_5X6_E]  118,67.75 0 bottom
M4:Q2  IRFH7545  [PQFN_5X6_E]  118,67.75 0 top
M4:Q3  IRFH7545  [PQFN_5X6_E]  118,61.25 0 bottom
M4:Q4  IRFH7545  [PQFN_5X6_E]  118,61.25 0 top
M4:Q5  IRFH7545  [PQFN_5X6_E]  118,54.75 0 bottom
M4:Q6  IRFH7545  [PQFN_5X6_E]  118,54.75 0 top
M4:R1  10k  [R0603]  104.25,67.25 0 bottom
M4:U1  DRV8303DCA  [TSSOP-48_PAD]  104.25,64.25 270 top
M4:U$1  MOTORCON  [GEN3CON]  130.25,56 270 top
R1  68k 1%  [R0603]  132.25,86.5 90 top
R2  10k 1%  [R0603]  129.5,88.25 180 top
R3  10k 1%  [R0603]  123.25,86.5 90 top
R4  10k 1%  [R0603]  126,86 0 top
R5  1k  [R0603]  62.25,7.75 180 bottom
R8  68k  [R0603]  73.25,42.75 90 top
R9  10k  [R0603]  77.75,42.75 270 top
R10  4.7k  [R0603]  79,56 90 bottom
R11  330  [R0603]  57.5,72.5 270 bottom
R12  4.7k  [R0603]  75.25,73.75 180 bottom
R13  270k  [R0603]  73.5,23.75 270 bottom
R14  100k  [R0603]  74,26.5 0 bottom
R15  43.2k  [R0603]  67.5,16.5 0 bottom
R16  150k  [R0603]  67.5,18.75 0 bottom
R17  10k  [R0603]  67.75,24.75 90 top
R18  1k  [R0603]  65.25,24.75 90 top
R19  1k  [R0603]  73,25 90 top
R20  160k 1%  [R0603]  60,24.5 180 bottom
R21  30.1k 1%  [R0603]  61.25,16.5 180 bottom
R22  1k  [R0603]  62.25,3 0 bottom
R23  1k  [R0603]  62.25,5.25 180 bottom
R26  0  [R0603]  60.25,34 0 bottom
R27  0  [R0603]  74.75,34 180 bottom
R28  0  [R0603]  69.75,34 0 bottom
R32  51.0k 1%  [R0603]  48.25,6 0 bottom
R36  160k 1%  [R0603]  44.75,6 0 bottom
R37  29.4k  [R0603]  51.75,7 90 bottom
R38  150k  [R0603]  53.75,11 270 bottom
R39  0  [R0603]  50.75,21.5 135 bottom
RN1  330  [RA-8_2506]  67.5,49 180 top
RN2  330  [RA-8_2506]  81.43,49.82 225 top
RN3  330  [RA-8_2506]  55.18,49.82 135 top
RN4  330  [RA-8_2506]  82.75,61 270 top
RN5  330  [RA-8_2506]  52.75,59.5 90 top
RN6  330  [RA-8_2506]  52.75,66.25 90 top
RN7  330  [RA-8_2506]  82.75,68 270 top
RN8  330  [RA-8_2506]  52.75,73.25 90 top
S3  34EWMSP12M6RT  [34EWMSP12M6RT]  123.25,75 270 top
U1  XC3S250E-4TQG144C  [TQFP144]  68.25,63 90 top
U2  MPM3620GQV-P  [MPM3620GQV-P]  46.25,10 90 bottom
U7  MPM3620GQV-P  [MPM3620GQV-P]  62.25,20.5 90 bottom
U8  VND5E006ASPTR-E  [POWERSO-16]  68,34.5 180 top
U11  MCP1824T-1202E/OT  [SOT-23-5]  73.5,31 0 bottom
U12  MCP1824T-2502E/OT  [SOT-23-5]  69.75,31 0 bottom
U$3  [MOTOR-1]  9.5,66.31 270 top
U$5  [MOTOR-2]  16.5,29.81 315 top
U$6  [MOTOR-3]  103.5,13.56 45 top
U$7  [MOTOR-4]  127,50.06 90 top
U$8  [ERR-M1]  16.75,35.5 270 top
U$10  TEENSY_3.5/3.6  [TEENSY_3.5/3.6]  74,95 0 top
U$12  [ERR-M2]  33.25,13 315 top
U$13  [ERR-M3]  117.25,35.5 45 top
U$14  [ERR-M4]  122.25,39.5 90 top
U$15  [ERR-KICK]  127.25,87.75 90 top
X1  ASV-18.432MHZ-EJ-T  [ASV]  70.5,78.75 180 bottom
XF1  30A  [3557-2]  91.75,12.5 270 top

## Library data of the parts
C1-C22 C47 C48 R1-R5 R8-R12 R23 R26-R28 R39 = resistor
C25 C41 M1:C1-M1:C3 M1:C6-M1:C10 M1:R1 M2:C1-M2:C3 M2:C6-M2:C10 M2:R1 M3:C1-M3:C3 M3:C6-M3:C10 M3:R1 M4:C1-M4:C3 M4:C6-M4:C10 M4:R1 R13 R14 R17-R19 R22 = rcl
C26 C44 = rcl; SPICEPREFIX: C
D1 D4 D5 = RoboJackets-LEDs; DIGIKEY: 160-1446-1-ND; MPN: LTST-C191KGKT
D6 = RoboJackets-LEDs; DIGIKEY: 160-1447-1-ND; MPN: LTST-C191KRKT; VALUE: GREEN
D8 D9 D11 D12 = RoboJackets-LEDs; DIGIKEY: 160-1447-1-ND; MPN: LTST-C191KRKT
F1 F2 = RoboJackets-Fuses
J6 = RoboJackets-Connectors; DIGIKEY: H125155-ND; MPN: DF22-2P-7.92DS(35)
M1:C12 M1:C13 M2:C12 M2:C13 M3:C12 M3:C13 M4:C12 M4:C13 = RoboJackets-Capacitors; DIGIKEY: P5572-ND; MANUFACTURER_PART_NUMBER: ECA-1HHG221
M1:J2 M2:J2 M3:J2 M4:J2 = RoboJackets-Connectors; DIGIKEY: WM18933-ND; MPN: 0353630460
M1:Q1-M1:Q6 M2:Q1-M2:Q6 M3:Q1-M3:Q6 M4:Q1-M4:Q6 = RoboJackets-Discrete; DIGIKEY: IRFH7545TRPBFCT-ND; MPN: IRFH7545TRPBF
M1:U1 M2:U1 M3:U1 M4:U1 = RoboJackets-PowerICs; DIGIKEY: 296-40070-1-ND; MPN: DRV8303DCAR
M1:U$1 M2:U$1 M3:U$1 M4:U$1 = gen3
R15 R16 R20 R21 R32 R36-R38 = rcl; SPICEPREFIX: R
RN1-RN8 = RoboJackets-Resistors; DIGIKEY: 742C163331JPCT-ND; MPN: 742C163331JP
S3 = RoboJackets-Switches; DIGIKEY: GH7540CT-ND; MPN: 34EWMSP12M6RT
U1 = RoboJackets-ICs; DIGIKEY: 122-1524-ND; MPN: XC3S250E-4TQG144C
U2 U7 = RoboJackets-PowerICs; DIGIKEY: 1589-1252-1-ND; MPN: MPM3620GQV-P
U8 = RoboJackets-PowerICs; DIGIKEY: 497-11623-1-ND; MPN: VND5E006ASPTR-E
U11 = RoboJackets-PowerICs; DIGIKEY: MCP1824T-1202E/OTCT-ND; MPN: MCP1824T-1202E/OT; VOLTAGE: 1.2V
U12 = RoboJackets-PowerICs; DIGIKEY: MCP1824T-2502E/OTCT-ND; MPN: MCP1824T-2502E/OT; VOLTAGE: 2.5V
U$3 U$5-U$8 U$12-U$15 = RoboJackets-Aesthetics
U$10 = Teensy356
X1 = RoboJackets-FreqGen; DIGIKEY: 535-9314-1-ND; MPN: ASV-18.432MHZ-EJ-T
XF1 = RoboJackets-Fuses; DIGIKEY: 36-3557-2-ND; MPN: 3557-2

## Nets
5V-LED: D5.A R23.2
5V-LED1: D1.A R5.2
18.5V-LED: D4.A R22.1
!CS!-FPGA: U1.69 U$10.10/CS
+1.2V: C6.1 C10.1 C14.1 C19.1 R27.2 U1.9 U1.45 U1.80 U1.115
+1.2V-PRE: C47.1 R27.1 U11.5
+2.5V: C4.1 C9.1 C15.1 C20.1 R10.2 R11.2 R28.2 U1.30 U1.65 U1.102 U1.137
+2.5V-PRE: C48.1 R28.1 U12.5
+3.3V: C5.1 C7.1 C8.1 C11.1 C12.1 C13.1 C16.1 C17.1 C18.1 C21.1 C22.1 D6.A D8.A D9.A D11.A D12.A R5.1 R12.1 R39.2 U1.13 U1.28 U1.42 U1.49 U1.57 U1.60 U1.62 U1.64 U1.79 U1.100 U1.121 U1.138 U1.143 U11.1 U11.3 U12.1 U12.3 X1.1 X1.4
+3.3V-FUSE: C26.1 F2.1 R36.2 U2.789
+5V: M1:J2.4 M1:U$1.1 M2:J2.4 M2:U$1.1 M3:J2.4 M3:U$1.1 M4:J2.4 M4:U$1.1 R3.1 R23.1 R26.2 U$10.VIN
+5V-FUSE: C44.1 F1.1 R20.2 U7.789
+18.5V: C25.1 C41.1 M1:C12.1 M1:C13.1 M1:Q1.5678 M1:Q3.5678 M1:Q5.5678 M1:U1.25 M2:C12.1 M2:C13.1 M2:Q1.5678 M2:Q3.5678 M2:Q5.5678 M2:U1.25 M3:C12.1 M3:C13.1 M3:Q1.5678 M3:Q3.5678 M3:Q5.5678 M3:U1.25 M4:C12.1 M4:C13.1 M4:Q1.5678 M4:Q3.5678 M4:Q5.5678 M4:U1.25 R1.1 R8.1 R22.2 U2.16 U7.16 XF1.3 XF1.4
AAM: R15.2 U7.18
AAM1: R37.2 U2.18
BATT-FPGA: C3.1 R8.2 R9.1 U1.136
CS1: R18.2 U8.10
CS2: R19.2 U8.15
CS-DIS: R17.2 U8.12
DD-!CS: RN6.11
DD-A-H: RN6.9
DD-A-L: RN8.16
DD-B-H: RN8.15
DD-B-L: RN8.14
DD-C-H: RN8.13
DD-C-L: RN8.12
DD-H1: RN8.11
DD-H2: RN8.10
DD-H3: RN8.9
EN: R16.2 U7.17
EN1: R38.2 U2.17
EN-PWR: R16.1 R38.1 S3.2 U8.9 U8.16
EN-PWR-PRE: R13.1 R14.2 S3.1
FB: R20.1 R21.2 U7.1
FB1: R32.2 R36.1 U2.1
FPGA-CLK: U1.50 X1.3
FPGA-DONE: R11.1 U1.72 U$10.7
FPGA-INIT: R12.2 U1.40 U$10.6
FPGA-PROG: R10.1 U1.1 U$10.5
GND: C1.2 C2.2 C3.2 C4.2 C5.2 C6.2 C7.2 C8.2 C9.2 C10.2 C11.2 C12.2 C13.2 C14.2 C15.2 C16.2 C17.2 C18.2 C19.2 C20.2 C21.2 C22.2 C25.2 C26.2 C41.2 C44.2 C47.2 C48.2 D1.C D4.C D5.C J6.2 M1:C1.2 M1:C2.2 M1:C9.2 M1:C10.2 M1:C12.2 M1:C13.2 M1:J2.3 M1:Q2.1 M1:Q2.2 M1:Q2.3 M1:Q4.1 M1:Q4.2 M1:Q4.3 M1:Q6.1 M1:Q6.2 M1:Q6.3 M1:U1.3 M1:U1.8 M1:U1.24 M1:U1.30 M1:U1.35 M1:U1.40 M1:U1.46 M1:U1.47 M1:U1.48 M1:U1.PAD M1:U$1.5 M2:C1.2 M2:C2.2 M2:C9.2 M2:C10.2 M2:C12.2 M2:C13.2 M2:J2.3 M2:Q2.1 M2:Q2.2 M2:Q2.3 M2:Q4.1 M2:Q4.2 M2:Q4.3 M2:Q6.1 M2:Q6.2 M2:Q6.3 M2:U1.3 M2:U1.8 M2:U1.24 M2:U1.30 M2:U1.35 M2:U1.40 M2:U1.46 M2:U1.47 M2:U1.48 M2:U1.PAD M2:U$1.5 M3:C1.2 M3:C2.2 M3:C9.2 M3:C10.2 M3:C12.2 M3:C13.2 M3:J2.3 M3:Q2.1 M3:Q2.2 M3:Q2.3 M3:Q4.1 M3:Q4.2 M3:Q4.3 M3:Q6.1 M3:Q6.2 M3:Q6.3 M3:U1.3 M3:U1.8 M3:U1.24 M3:U1.30 M3:U1.35 M3:U1.40 M3:U1.46 M3:U1.47 M3:U1.48 M3:U1.PAD M3:U$1.5 M4:C1.2 M4:C2.2 M4:C9.2 M4:C10.2 M4:C12.2 M4:C13.2 M4:J2.3 M4:Q2.1 M4:Q2.2 M4:Q2.3 M4:Q4.1 M4:Q4.2 M4:Q4.3 M4:Q6.1 M4:Q6.2 M4:Q6.3 M4:U1.3 M4:U1.8 M4:U1.24 M4:U1.30 M4:U1.35 M4:U1.40 M4:U1.46 M4:U1.47 M4:U1.48 M4:U1.PAD M4:U$1.5 R2.2 R4.2 R9.2 R14.1 R15.1 R17.1 R18.1 R19.1 R21.1 R32.1 R37.1 S3.3 S3.LEG1 S3.LEG3 U1.11 U1.19 U1.27 U1.37 U1.46 U1.55 U1.61 U1.73 U1.90 U1.99 U1.118 U1.127 U1.133 U2.3 U2.12 U2.13 U2.14 U7.3 U7.12 U7.13 U7.14 U8.13 U11.2 U12.2 U$10.GND X1.2
LED-M1: D9.C
LED-M2: D8.C
LED-M3: D12.C
LED-M4: D11.C
M1-!CS: M1:U1.4 RN5.13
M1-A-H: M1:U1.15 RN5.9
M1-A-L: M1:U1.16 RN6.16
M1-B-H: M1:U1.13 RN5.11
M1-B-L: M1:U1.14 RN5.10
M1-C-H: M1:U1.17 RN6.14
M1-C-L: M1:U1.18 RN6.13
M1-ENC-A: M1:J2.2 RN5.14
M1-ENC-B: M1:J2.1 RN5.12
M1-H1: M1:U$1.3 RN6.10
M1-H2: M1:U$1.4 RN6.12
M1-H3: M1:U$1.2 RN6.15
M1:!FAULT: M1:U1.2
M1:!OCTW: M1:U1.1
M1:+3.3V: M1:C1.1 M1:C10.1 M1:R1.1 M1:U1.19 M1:U1.20 M1:U1.45
M1:AVDD: M1:C2.1 M1:U1.23
M1:BST-A: M1:C6.1 M1:U1.44
M1:BST-B: M1:C7.1 M1:U1.39
M1:BST-C: M1:C8.1 M1:U1.34
M1:CP1: M1:C3.1 M1:U1.10
M1:CP2: M1:C3.2 M1:U1.11
M1:EN-GATE: M1:R1.2 M1:U1.12
M1:GH-A: M1:Q1.4 M1:U1.43
M1:GH-B: M1:Q3.4 M1:U1.38
M1:GH-C: M1:Q5.4 M1:U1.33
M1:GL-A: M1:Q2.4 M1:U1.41
M1:GL-B: M1:Q4.4 M1:U1.36
M1:GL-C: M1:Q6.4 M1:U1.31
M1:GVDD: M1:C9.1 M1:U1.9
M1:PHASE-A: M1:C7.2 M1:Q3.1 M1:Q3.2 M1:Q3.3 M1:Q4.5678 M1:U1.37 M1:U$1.10 M1:U$1.11
M1:PHASE-B: M1:C6.2 M1:Q1.1 M1:Q1.2 M1:Q1.3 M1:Q2.5678 M1:U1.42 M1:U$1.8 M1:U$1.9
M1:PHASE-C: M1:C8.2 M1:Q5.1 M1:Q5.2 M1:Q5.3 M1:Q6.5678 M1:U1.32 M1:U$1.6 M1:U$1.7
M1:SO1: M1:U1.21
M1:SO2: M1:U1.22
M2-!CS: M2:U1.4 RN3.16
M2-A-H: M2:U1.15 RN3.13
M2-A-L: M2:U1.16 RN3.12
M2-B-H: M2:U1.13 RN3.15
M2-B-L: M2:U1.14 RN3.14
M2-C-H: M2:U1.17 RN3.11
M2-C-L: M2:U1.18 RN3.10
M2-ENC-A: M2:J2.2 RN1.10
M2-ENC-B: M2:J2.1 RN1.9
M2-H1: M2:U$1.3 RN5.15
M2-H2: M2:U$1.4 RN5.16
M2-H3: M2:U$1.2 RN3.9
M2:!FAULT: M2:U1.2
M2:!OCTW: M2:U1.1
M2:+3.3V: M2:C1.1 M2:C10.1 M2:R1.1 M2:U1.19 M2:U1.20 M2:U1.45
M2:AVDD: M2:C2.1 M2:U1.23
M2:BST-A: M2:C6.1 M2:U1.44
M2:BST-B: M2:C7.1 M2:U1.39
M2:BST-C: M2:C8.1 M2:U1.34
M2:CP1: M2:C3.1 M2:U1.10
M2:CP2: M2:C3.2 M2:U1.11
M2:EN-GATE: M2:R1.2 M2:U1.12
M2:GH-A: M2:Q1.4 M2:U1.43
M2:GH-B: M2:Q3.4 M2:U1.38
M2:GH-C: M2:Q5.4 M2:U1.33
M2:GL-A: M2:Q2.4 M2:U1.41
M2:GL-B: M2:Q4.4 M2:U1.36
M2:GL-C: M2:Q6.4 M2:U1.31
M2:GVDD: M2:C9.1 M2:U1.9
M2:PHASE-A: M2:C7.2 M2:Q3.1 M2:Q3.2 M2:Q3.3 M2:Q4.5678 M2:U1.37 M2:U$1.10 M2:U$1.11
M2:PHASE-B: M2:C6.2 M2:Q1.1 M2:Q1.2 M2:Q1.3 M2:Q2.5678 M2:U1.42 M2:U$1.8 M2:U$1.9
M2:PHASE-C: M2:C8.2 M2:Q5.1 M2:Q5.2 M2:Q5.3 M2:Q6.5678 M2:U1.32 M2:U$1.6 M2:U$1.7
M2:SO1: M2:U1.21
M2:SO2: M2:U1.22
M3-!CS: M3:U1.4 RN4.12
M3-A-H: M3:U1.15 RN4.9
M3-A-L: M3:U1.16 RN2.16
M3-B-H: M3:U1.13 RN4.11
M3-B-L: M3:U1.14 RN4.10
M3-C-H: M3:U1.17 RN2.15
M3-C-L: M3:U1.18 RN2.14
M3-ENC-A: M3:J2.2 RN2.10
M3-ENC-B: M3:J2.1 RN2.9
M3-H1: M3:U$1.3 RN2.11
M3-H2: M3:U$1.4 RN2.12
M3-H3: M3:U$1.2 RN2.13
M3:!FAULT: M3:U1.2
M3:!OCTW: M3:U1.1
M3:+3.3V: M3:C1.1 M3:C10.1 M3:R1.1 M3:U1.19 M3:U1.20 M3:U1.45
M3:AVDD: M3:C2.1 M3:U1.23
M3:BST-A: M3:C6.1 M3:U1.44
M3:BST-B: M3:C7.1 M3:U1.39
M3:BST-C: M3:C8.1 M3:U1.34
M3:CP1: M3:C3.1 M3:U1.10
M3:CP2: M3:C3.2 M3:U1.11
M3:EN-GATE: M3:R1.2 M3:U1.12
M3:GH-A: M3:Q1.4 M3:U1.43
M3:GH-B: M3:Q3.4 M3:U1.38
M3:GH-C: M3:Q5.4 M3:U1.33
M3:GL-A: M3:Q2.4 M3:U1.41
M3:GL-B: M3:Q4.4 M3:U1.36
M3:GL-C: M3:Q6.4 M3:U1.31
M3:GVDD: M3:C9.1 M3:U1.9
M3:PHASE-A: M3:C7.2 M3:Q3.1 M3:Q3.2 M3:Q3.3 M3:Q4.5678 M3:U1.37 M3:U$1.10 M3:U$1.11
M3:PHASE-B: M3:C6.2 M3:Q1.1 M3:Q1.2 M3:Q1.3 M3:Q2.5678 M3:U1.42 M3:U$1.8 M3:U$1.9
M3:PHASE-C: M3:C8.2 M3:Q5.1 M3:Q5.2 M3:Q5.3 M3:Q6.5678 M3:U1.32 M3:U$1.6 M3:U$1.7
M3:SO1: M3:U1.21
M3:SO2: M3:U1.22
M4-!CS: M4:U1.4 RN7.16
M4-A-H: M4:U1.15 RN7.15
M4-A-L: M4:U1.16 RN7.14
M4-B-H: M4:U1.13 RN4.16
M4-B-L: M4:U1.14 RN4.15
M4-C-H: M4:U1.17 RN7.13
M4-C-L: M4:U1.18 RN7.12
M4-ENC-A: M4:J2.2 RN4.14
M4-ENC-B: M4:J2.1 RN4.13
M4-H1: M4:U$1.3 RN7.9
M4-H2: M4:U$1.4 RN7.10
M4-H3: M4:U$1.2 RN7.11
M4:!FAULT: M4:U1.2
M4:!OCTW: M4:U1.1
M4:+3.3V: M4:C1.1 M4:C10.1 M4:R1.1 M4:U1.19 M4:U1.20 M4:U1.45
M4:AVDD: M4:C2.1 M4:U1.23
M4:BST-A: M4:C6.1 M4:U1.44
M4:BST-B: M4:C7.1 M4:U1.39
M4:BST-C: M4:C8.1 M4:U1.34
M4:CP1: M4:C3.1 M4:U1.10
M4:CP2: M4:C3.2 M4:U1.11
M4:EN-GATE: M4:R1.2 M4:U1.12
M4:GH-A: M4:Q1.4 M4:U1.43
M4:GH-B: M4:Q3.4 M4:U1.38
M4:GH-C: M4:Q5.4 M4:U1.33
M4:GL-A: M4:Q2.4 M4:U1.41
M4:GL-B: M4:Q4.4 M4:U1.36
M4:GL-C: M4:Q6.4 M4:U1.31
M4:GVDD: M4:C9.1 M4:U1.9
M4:PHASE-A: M4:C7.2 M4:Q3.1 M4:Q3.2 M4:Q3.3 M4:Q4.5678 M4:U1.37 M4:U$1.10 M4:U$1.11
M4:PHASE-B: M4:C6.2 M4:Q1.1 M4:Q1.2 M4:Q1.3 M4:Q2.5678 M4:U1.42 M4:U$1.8 M4:U$1.9
M4:PHASE-C: M4:C8.2 M4:Q5.1 M4:Q5.2 M4:Q5.3 M4:Q6.5678 M4:U1.32 M4:U$1.6 M4:U$1.7
M4:SO1: M4:U1.21
M4:SO2: M4:U1.22
MISO-AUX: M1:U1.6 M2:U1.6 M3:U1.6 M4:U1.6 RN1.12
MISO-FPGA: U1.44 U$10.12/MISO
MOSI-AUX: M1:U1.5 M2:U1.5 M3:U1.5 M4:U1.5 RN1.11
MOSI-FPGA: U1.63 U$10.11/MOSI
N$1: F2.2 R39.1
N$2: F1.2 R26.1
PWR-ERR: D6.C U11.4 U12.4
R-P1: RN8.1 U1.82
R-P2: RN8.2 U1.81
R-P3: RN8.3 U1.77
R-P4: RN8.4 U1.76
R-P5: RN8.5 U1.75
R-P6: RN8.6 U1.74
R-P7: RN8.7 U1.70
R-P8: RN8.8 U1.68
R-P9: RN6.1 U1.91
R-P10: RN6.2 U1.89
R-P11: RN6.3 U1.88
R-P12: RN6.4 U1.87
R-P13: RN6.5 U1.86
R-P14: RN6.6 U1.85
R-P15: RN6.7 U1.84
R-P16: RN6.8 U1.83
R-P17: RN5.1 U1.101
R-P18: RN5.2 U1.98
R-P19: RN5.3 U1.97
R-P20: RN5.4 U1.96
R-P21: RN5.5 U1.95
R-P22: RN5.6 U1.94
R-P23: RN5.7 U1.93
R-P24: RN5.8 U1.92
R-P25: RN3.1 U1.117
R-P26: RN3.2 U1.116
R-P27: RN3.3 U1.113
R-P28: RN3.4 U1.112
R-P29: RN3.5 U1.106
R-P30: RN3.6 U1.105
R-P31: RN3.7 U1.104
R-P32: RN3.8 U1.103
R-P36: RN1.4 U1.125
R-P37: RN1.5 U1.124
R-P38: RN1.6 U1.123
R-P39: RN1.7 U1.122
R-P40: RN1.8 U1.119
R-P41: RN2.1 U1.5
R-P42: RN2.2 U1.4
R-P43: RN2.3 U1.3
R-P44: RN2.4 U1.2
R-P45: RN2.5 U1.142
R-P46: RN2.6 U1.141
R-P47: RN2.7 U1.140
R-P48: RN2.8 U1.139
R-P49: RN4.1 U1.21
R-P50: RN4.2 U1.20
R-P51: RN4.3 U1.17
R-P52: RN4.4 U1.16
R-P53: RN4.5 U1.15
R-P54: RN4.6 U1.14
R-P55: RN4.7 U1.8
R-P56: RN4.8 U1.7
R-P57: RN7.1 U1.35
R-P58: RN7.2 U1.34
R-P59: RN7.3 U1.32
R-P60: RN7.4 U1.31
R-P61: RN7.5 U1.26
R-P62: RN7.6 U1.25
R-P63: RN7.7 U1.24
R-P64: RN7.8 U1.23
SCK-AUX: M1:U1.7 M2:U1.7 M3:U1.7 M4:U1.7 RN1.13
SCK-FPGA: U1.71 U$10.13/SCK
SENSE-BATT: C1.1 R1.2 R2.1 U$10.34/A15
SENSE-VIN: C2.1 R3.2 R4.1 U$10.35/A16
SW: U7.456
SW1: U2.456
VBATT: U8.1 U8.2 U8.3 U8.4 U8.5 U8.6 U8.7 U8.8 XF1.1 XF1.2
VIN: J6.1 R13.2 U8.17

## Tracks (layer width: path | path; a pad name or v marks a point on that pad's centre or on a via)
5V-LED  (via drill 0.35)
  Top 0.3: D5.A v63,6.25
  Bottom 0.3: v63,6.25 63,5.35 R23.2
5V-LED1  (via drill 0.35)
  Top 0.3: D1.A v63,8.88
  Bottom 0.3: v63,8.88 63.1,8.77 R5.2
18.5V-LED  (via drill 0.35)
  Top 0.3: D4.A v63,4
  Bottom 0.3: v63,4 63,3.1 R22.1
!CS!-FPGA  (via drill 0.35)
  Top 0.3: U1.69 61,72.6 61.6,72 v62,72
  Bottom 0.152: 69.75,85.5 70,85.75 72.75,85.75 74,87 U$10.10/CS
  Bottom 0.254: 65.75,81.5 69.75,85.5
  Bottom 0.3: v62,72 62,76.11 62.89,77 64.75,77 65.75,78 65.75,81.5
+1.2V  (via drill 0.35, 0.75)
  Top 0.3: U1.80 58.52,68.25 59.02,67.75 v60.75,67.75 | U1.45 73,72.73 73.25,72.48 v73.25,72 | v63.75,54 62.75,54 62.5,53.75 U1.115 | v77.25,58.5 77.5,58.25 U1.9
  3v3 0.3: v75.62,28.62 75.62,27.88 72.75,25 72.75,22 62.25,11.5 60.75,11.5 v59.25,10
  5v 0.3: v64.25,60 64.25,54.5 v63.75,54 63.75,52.5 65.25,51 74.75,51 77.25,48.5 77.25,46 v79.25,44
  Bottom 0.3: v73.25,72 73.25,71.6 C19.1 71.25,69.6 71.25,66.5 70.75,66 64.25,66 | C6.1 64,54.25 v63.75,54 | 64.25,66 v64.25,60 74.6,60 C10.1 77,58.75 v77.25,58.5 | v60.75,67.75 61.4,67.75 C14.1 63.15,66 64.25,66 | v79.25,44 79.25,37.65 R27.2 75.6,28.65 v75.62,28.62
+1.2V-PRE
  Bottom 0.3: U11.5 73.9,32.86 R27.1 73.9,36.3 C47.1
+2.5V  (via drill 0.35, 0.75)
  Top 0.3: U1.30 77.98,68.75 77.73,69 v77.25,69 | U1.65 63,72.25 v62.75,72 | U1.102 58.52,57.25 58.77,57 v60.75,57 | U1.137 73.5,53.4 72.9,54 v72.75,54
  3v3 0.3: v76,26 76,13.75 72.25,10 61.25,10 60.25,9 57.75,9 v56.75,10
  5v 0.3: v62.75,72 62.75,71 61.75,70 | 61.75,56 61.75,53.5 64.75,50.5 73.75,50.5 76.25,48 v76.25,45.5 | 61.75,56 61.75,62 | 61.75,62 61.75,70 | 61.75,56 v60.75,57 | 61.75,70 v60.75,70 | 61.75,62 71.75,62 | 71.75,62 75.25,62 | 75.25,62 78.25,62 81.25,59 v81.25,57 | 71.75,62 71.75,55 v72.75,54 | 75.25,62 75.25,67 v77.25,69
  Bottom 0.3: R11.2 59.15,70 v60.75,70 | C15.1 76.85,69 v77.25,69 | C20.1 62.85,72 v62.75,72 | C9.1 61.6,57 v60.75,57 | C4.1 72.75,54.65 v72.75,54 | v81.25,57 79,57 R10.2 | v76,26 76,26.25 80.75,31 80.75,44 79.25,45.5 v76.25,45.5 75,45.5 67.9,38.25 67.9,35.15 R28.2
+2.5V-PRE
  Bottom 0.3: U12.5 70.7,33.9 R28.1 C48.1
+3.3V  (via drill 0.35, 0.75)
  Top 0.152: D11.A 124.75,39.75 123.63,38.63 123.63,38.5 v123.85,38.5 | v121.75,36.75 v121.75,35.5 | v41.88,16.88 41.75,17 38.5,13.75 34.81,13.75 D8.A 30.65,10.47 29.68,11.44 29.68,11.57 26.25,15 26.25,19 v24,21.25 | D6.A 62.25,12.75 62.25,14.5 59.78,16.97 59.28,16.97 53.51,22.75 52.5,22.75 v52.25,23 | v66,12.4 66,13.51 65.72,13.78 65.72,14.22 65.98,14.48 65.98,15.75 65.98,18.73
  Top 0.3: U1.100 59.5,58.25 v59.75,58 | D9.A 14,34.25 v14,33.5 | v126.25,39 125.75,39 D11.A | D8.A 31.25,10.19 v31.25,9.5 | v63.75,11 63.75,11.25 D6.A 63,11 v59.75,7.75 | U1.79 59.5,68.75 v59.75,69 | v77.15,67.75 U1.28 | v70.75,72 71,72.25 U1.49 | U1.42 74.5,72.25 v74.25,72 | 63.5,72.25 U1.64 | U1.62 64.5,72.5 64.5,72.23 64.27,72 | v66.25,54 65.75,54 65.5,53.75 U1.121 | U1.138 74,53.4 74.25,53.65 v74.25,54 | U1.143 76.5,53.27 76.25,53.52 v76.25,54 | v121.75,35.5 121.54,35.29 D12.A | U1.13 77.5,60.25 v77.25,60.5
  Top 0.305: v67,74.75 U1.57 67,72.72 66.78,72.5 66.4,72.5 v66.25,72.35 66.25,72.5 65.72,72.5 65.5,72.72 | v77.15,67.75 76.25,67.75 v74.45,69.55 | 64.27,72 63.75,72 63.5,72.25 | 64.5,72.5 64.72,72.5 65.28,72.5 65.5,72.72 | U1.60 65.5,72.72 | v62.7,69.45 63.25,70 v65,70 | v77.25,60.5 77.25,60.35 76.65,59.75 76.65,55.25 C8.1 | v62.52,57.77 63.98,57.77 v66,55.75 | v66.25,54 67.65,54 68.25,54.6 73,54.6 73.6,54 v74.25,54 | U1.138 74.05,52.35 74.05,50.93 76.75,48.23 76.75,47.14 78.6,45.29 78.6,41 79.75,39.85 79.75,39.75 v79.85,39.75 | v76.5,28.5 76.35,28.5 75.88,28.02 75.38,28.02 74.9,28.5 v74.75,28.5
  Bottom 0.152: v52.25,23 R39.2 | R39.2 | v123.85,38.5 122.1,36.75 v121.75,36.75 | v41.88,16.88 42.62,16.88 43,16.5 43.75,16.5 v50.25,23 | v24,21.25 14,31.25 v14,33.5 | R5.1 62.47,8.82 62.47,9.09 62.78,9.4 62.9,9.4 66,12.5 v66,12.4
  Bottom 0.3: C16.1 61.75,69 v59.75,69 | 76.25,64.5 76.25,62.5 75.85,62.1 C12.1 76.75,61 v77.25,60.5 | C13.1 76.25,66.15 76.25,66.93 77.07,67.75 v77.15,67.75 | C17.1 70.25,71.5 v70.75,72 | C21.1 74.25,70.65 v74.25,72 74.25,73.6 R12.1 | C18.1 65.9,70.85 | C11.1 60.65,58 v59.75,58 | C7.1 v66.25,54 | C5.1 74.25,54.9 v74.25,54 | C8.1 76.75,54.5 v76.25,54 | X1.4 68.23,77.02 | 68.23,77.02 71.15,79.94 C22.1 | v67.75,82.5 67.96,82.29 X1.1 67.96,77.29 68.23,77.02 | U11.1 74.45,30.3 73.75,31 73.36,31 72.55,30.19 U11.3 71.86,29 71.39,29 U12.1 70.7,30.57 70.52,30.75 69,30.75 68.8,30.55 U12.3 68.75,29.64 v68.75,23 | R5.1 v59.75,7.75
  Bottom 0.305: v67,74.75 67,75.79 X1.4 | C17.1 68.95,70.85 68.5,70.4 68,70.4 67.55,70.85 C18.1 | v74.45,69.55 74.45,70.45 C21.1 | v66.25,72.35 C18.1 | C16.1 62.1,69.5 62.65,69.5 v62.7,69.45 | v65,70 65.85,70.85 C18.1 | C13.1 76.25,65.85 76.25,64.5 | v74.25,54 v76.25,54 | C11.1 61.5,58.75 62.48,57.77 v62.52,57.77 | v66,55.75 66,55.4 C7.1 | v79.85,39.75 79.85,37.35 76.5,34 v76.5,28.5 | v74.75,28.5 74.45,28.8 U11.1
  other vias: 51.25,24 51.75,23.5 50.75,23.5 76.75,55.15
  pour 3v3 (isolate 0.4, rank 2, no thermals): 0.25,92 0.25,34 33.88,0.38 104,0.38 136.25,32.62 136.25,92 122.25,106 14.71,106
  pour Bottom (no thermals): 51.38,21.38 49.75,23 51.25,24.5 52.88,22.88
+3.3V-FUSE
  Bottom 0.3: R36.2 42,7.9 42,9.38 43.62,11 U2.789
  pour Bottom (no thermals): 44,10.75 46,10.75 46,12.62 46,12.75 46.5,13.25 46.5,16.12 47.38,17 46.25,18.12 44,15.88
+5V  (via drill 0.35, 0.75)
  Top 0.152: R3.1 123.25,81.92 122.01,80.68 122.01,69.32 122.14,69.18 126.57,69.18 127.5,68.25 v127.5,62.5 | v131.25,46 129,46 | 129,46 128.75,46 | 129,46 128.25,46.75 M4:U$1.1 | v104,14.75 101.78,12.53 101.78,11.78 99.24,9.25 77.5,9.25 v77.25,9 | v59.5,15.6 58.5,14.6 58.5,10.36 58.46,10.33 58.46,7.54 v58.75,7.25 58.47,6.97 46.03,6.97 45.78,7.22 v44,7.22
  Top 0.254: U$10.VIN 61.44,102.62 62.19,103.37 103.66,103.37 104.78,102.25 104.78,101.95 105.37,101.37 107.38,101.37 123.25,85.5 123.25,85
  Top 0.3: 123.25,85 R3.1
  Top 0.305: M1:U$1.1 v10.25,66 | M2:U$1.1 17.25,30.07 v17.25,30.25 | M3:U$1.1 104.43,14.75 v104,14.75 | v116.25,24.75 118.5,24.75 122.62,28.87 M3:J2.4 | v33.5,7.25 41.25,7.25 M2:J2.4 | M4:U$1.1 127.25,51 126.25,50 126.25,43.35 M4:J2.4
  Bottom 0.152: v127.5,62.5 130.5,62.5 131.25,61.75 v131.25,46 | R23.1 62.47,6.32 62.47,6.47 62.78,6.78 75.03,6.78 v77.25,9 | R26.2 59.4,25.62 59.88,25.14 59.88,23.86 59.5,23.48 59.5,17.99 59.22,17.72 59.22,17.21 59.5,16.94 v59.5,15.6 | v58.75,7.25 58.75,6.75 60,5.5 | M2:J2.4 43,8.85 43,8 43.75,7.25 44,7.25 v44,7.22 | v17.25,30.25 14.53,32.97 14.53,33.72 14.5,33.74 14.5,34 14.24,34 14.22,34.03 13.78,34.03 13.76,34 13.5,34 10,37.5 M1:J2.4
  Bottom 0.3: v59.75,5.5 60,5.5 61.15,5.5 R23.1
  Bottom 0.305: v10.25,66 9.5,65.25 9.5,59.5 7,57 7,41.35 M1:J2.4 | v104,14.75 106.25,17 107.5,17 115.25,24.75 v116.25,24.75 | v17.25,30.25 25.75,21.75 25.75,14.35 28.35,11.75 28.35,10.9 32,7.25 v33.5,7.25
  Bottom 0.7: R26.2 59.4,35.35 v59.38,35.38
  pour 5v (no thermals): 15.14,106.25 0.25,91.75 0.25,33.88 33.75,0.25 102.5,0.25 136.12,32.5 136.25,92 121.54,106.25
+5V-FUSE
  pour Bottom (no thermals): 59.75,23 59.75,20.75 62,20.75 62,23 61.75,23.5 61.75,28 60.25,28 60.25,23.5
  pour Bottom (no thermals): 61.75,28 61.75,26 59.75,26 59.75,30.5 61.75,30.5
+18.5V  (via drill 0.35, 0.75)
  Top 0.152: M3:C13.1 112.75,78.5 M2:C13.1 115.25,76 v115.25,74.5 | v103.2,54.2 103,54 102.75,54 M4:C12.1 M1:C13.1 108,48 108.5,47.5 v108.5,47.25 | v107.5,56.5 108.5,57.5 108.5,58.5 | R1.1 127.85,81.25 v123.5,81.25 | M1:C12.1 38.25,67.5 M2:C12.1 30,66.37 v30,65.75 30,65.53
  Top 0.3: R8.1 73.25,41.75 84.38,30.62 v84.38,15.88 | M1:U1.25 v28.25,61.75 | M2:U1.25 35.59,34.66 v35.25,35 | v95.12,28.25 95.12,28.25 M3:U1.25 | M4:U1.25 108.5,58.5 v109.35,58.5
  Top 0.305: v89,23.75 v90.5,25.25
  Bottom 0.152: 58,8 57.27,8 54.39,10.88 53.11,10.88 52.97,10.74 52.97,10.72 v52.25,10 | v103.2,54.2 105.5,56.5 v107.5,56.5 | v108.5,47.25 111.25,44.5 v111.25,37.88 | v123.5,81.25 118.25,76 v118.25,74.5 | v30,65.75 30,63.5 v28.25,61.75 | v28.75,35.5 28.75,39 M4:C13.1
  Bottom 0.3: R22.2 v59.75,3 59.25,3 58,4.25 58,8 58,20.25 M3:C12.1 | v28.25,61.75 26.5,63.5 21.75,63.5 20.5,62.25 M1:Q5.5678 | v35.25,35 32.75,35 30.25,32.5 30.25,31.12 M2:Q5.5678 | v95.12,28.25 95.12,26.12 97.41,23.84 M3:Q5.5678 | v109.35,58.5 113.75,58.5 116.5,61.25 M4:Q3.5678 | U2.16 50.35,9.75 C25.1
  Bottom 0.305: C41.1 71.99,18.36 71.99,18.12 72.75,17.36 v72.75,16 | v72.75,16 v73.75,16 | v73.75,16 v74.75,16 | v74.75,16 v74.75,15 | v73.75,16 v73.75,15 | v72.75,16 v72.75,15 v72.75,14 v73.75,14 v74.75,14 | v74.75,16 84.25,16 v84.38,15.88 | v84.38,15.88 84.38,19.12 v89,23.75 | v90.5,25.25 93.5,28.25 v95.12,28.25 | v84.38,15.88 90.05,10.2 XF1.3
  other vias: 116.25,74.5 117.25,74.5 118.25,73.5 117.25,73.5 116.25,73.5 115.25,73.5 115.25,72.5 116.25,72.5 117.25,72.5 118.25,72.5 25.75,32.5 26.75,31.5 26.75,32.5 26.75,33.5 27.75,32.5 27.75,33.5 28.75,33.5 27.75,34.5 28.75,34.5 29.75,34.5 17.75,69.5 18.75,69.5 19.75,69.5 20.75,69.5 17.75,68.5 18.75,68.5 19.75,68.5 20.75,68.5 17.75,67.5 18.75,67.5 19.75,67.5 20.75,67.5 109.75,36.5 110.5,37.12 112.12,37.12 111.38,36.5 110.62,35.75 111.62,35 112.25,35.62 113,36.25 112.5,34.12 113.12,34.75 113.88,35.5 52.25,11.5 52.25,10.75
  pour Bottom (no thermals): 64,20.4 67.75,20.4 67.75,21 69.25,21 69.25,20.1 64,20.1
  pour Bottom (no thermals): 40.75,17 31.25,33 32.25,32
  pour Bottom (no thermals): 114.25,75 114.25,52.5 119.25,52.5 119.25,75
  pour Bottom (no thermals): 28.75,36 25.75,33 25.25,32.5 40.75,17 44.25,20.5
  pour Bottom (no thermals): 17.25,70 17.25,47 22.25,47 22.25,69.5 24.25,71.5 24.25,72 24.25,89 19.25,89 19.25,72
  pour Vbatt (no thermals): 2.25,94 14.75,94 15.25,94.5 26.25,94.5 32.25,88.5 32.25,72 33.75,70.5 45.25,70.5 46.25,69.5 46.25,64 45.25,63 35.25,63 29.75,57.5 29.75,47.5 30.25,47 32.25,47 52.75,26.5 76.25,26.5 86.25,16.5 95.75,16.5 100.75,21.5 100.75,22 93.5,29.25 102.75,38.5 102.75,43 94.75,51 94.75,55.5 103.25,64 103.25,82 136.25,82 136.25,32.62 104,0.38 34.88,0.38 0.25,35 0.25,92
  pour Bottom (no thermals): 67.75,22.5 67.75,20 68.75,20 69.9,18.5 69.9,15.5 72.13,13.5 76.25,13.5 76.25,17 72.25,17 71.75,17.5 71.75,21.5 70.75,22.5
  pour Bottom (no thermals): 96.25,24 99.75,20.5 114.75,35.5 111.25,39
  pour Bottom (no thermals): 50.25,10.75 51.75,10.75 51.75,11.88 52.75,11.88 52.75,9.62 50.25,9.62
AAM
  Bottom 0.2: U7.18 65.25,18.7 65.25,17.9 R15.2
AAM1
  Bottom 0.3: U2.18 50.85,8.75 R37.2
BATT-FPGA
  Top 0.3: U1.136 73,50.25 77,46.25 77,45.1 C3.1 | C3.1 R9.1 | C3.1 R8.2
BOLT1  (via drill 3.8 pad 7.2)
  other vias: 11,96.94
BOLT2  (via drill 3.8 pad 7.2)
  other vias: 125.25,96.94
BOLT3  (via drill 3.8 pad 7.2)
  other vias: 116.75,40.94
BOLT4  (via drill 3.8 pad 7.2)
  other vias: 19.75,40.94
CS1
  Top 0.3: U8.10 66,27.25 65.25,26.5 R18.2
CS2
  Top 0.3: R19.2 72.85,26 71.25,26 70,27.25 U8.15
CS-DIS
  Top 0.3: R17.2 67.6,26 U8.12
DD-!CS
  Top 0.3: RN6.11 51.9,67.5
DD-A-L
  Top 0.3: 51.63,70.45 RN8.16
DD-B-H
  Top 0.3: 51.63,71.25 RN8.15
DD-B-L
  Top 0.3: RN8.14 51.63,72.05
DD-C-H
  Top 0.3: 51.63,72.85 RN8.13
DD-C-L
  Top 0.3: 51.63,73.65 RN8.12
DD-H1
  Top 0.3: RN8.11 51.63,74.45
DD-H2
  Top 0.3: 51.63,75.25 RN8.10
EN
  Bottom 0.2: U7.17 65.03,19.75 66.03,18.75 R16.2
EN1
  Bottom 0.3: U2.17 52.85,9.25 R38.2
EN-PWR  (via drill 0.35)
  Top 0.3: S3.2 127.75,79.5 132.25,79.5 133.25,78.5 133.25,32 103.25,2 82.89,2 71.32,13.57 71.32,21.57 72.25,22.5 74.25,22.5 76.75,25 76.75,26.5 76.25,27 71.75,27 70.8,27.95 U8.16 70.75,28.55 70.75,29.5 70.25,30 65.83,30 65.2,29.37 U8.9 65.2,28.45 62.25,25.5 62.25,23 67.25,18 v67.25,14
  5v 0.3: v56.75,13.5 v59.25,13.5
  Bottom 0.3: R16.1 69.25,17.75 69.25,15.1 68.25,14 v67.25,14 66.25,13 65.25,13 64.75,13.5 v59.25,13.5 | R38.1 55.4,13.5 v56.75,13.5
EN-PWR-PRE  (via drill 0.35)
  Top 0.3: S3.1 124.56,80 132.25,80 132.3,79.95 132.44,79.95 133.75,78.64 133.75,31.57 103.68,1.5 82.75,1.5 70.75,13.5 70.75,22 71.75,23 73.75,23 74.75,24 v74.75,25
  Bottom 0.3: R14.2 73.5,26.15 73.5,25.5 | 73.5,25.5 R13.1 | v74.75,25 74.25,25.5 73.5,25.5
FB
  Bottom 0.2: U7.1 63.8,18.2 R21.2
  Bottom 0.3: R21.2 62.1,15.35 61.75,15 59.25,15 58.75,15.5 58.75,24.1 R20.1
FB1
  Bottom 0.3: U2.1 47.8,6.4 R32.2 R36.1
FPGA-CLK  (via drill 0.35)
  Top 0.3: v70.75,76.5 70.5,76.25 U1.50
  Bottom 0.3: X1.3 72.79,76.5 v70.75,76.5
FPGA-DONE  (via drill 0.35)
  Top 0.3: U1.72 59.4,73.5 v58.75,73.5
  Bottom 0.152: 66.13,87.38 66.25,87.38 | 66.25,87.38 U$10.7 | 63.75,81.5 63.75,81.75 66.5,84.5 66.5,87.13 66.25,87.38
  Bottom 0.3: R11.1 57.65,73.5 v58.75,73.5 58.75,74.5 63.75,79.5 63.75,81.5
FPGA-INIT  (via drill 0.35)
  Top 0.152: v70.55,82.25 74.51,82.25 74.53,82.28 74.97,82.28 v77.25,80 | v69,83.75 67.75,85 65.75,85 63.84,86.91 U$10.6
  Top 0.3: U1.40 75.5,72.25 v75.75,72
  Bottom 0.152: v70.55,82.25 69.05,83.75 v69,83.75
  Bottom 0.3: v75.75,72 76.1,72.35 R12.2 77.25,74.9 v77.25,80
FPGA-PROG  (via drill 0.35)
  Top 0.152: v78,81 74.75,84.25 v70.75,84.25 | v69.47,84.34 68.5,85.31 68.5,85.5 66,85.5 v65.97,85.53
  Top 0.3: U1.1 79.25,53.85 v79.25,53.5
  Bottom 0.152: 79.25,60.5 79.25,73.75 78,75 v78,81 | v70.75,84.25 69.5,84.25 69.47,84.28 v69.47,84.34 | v65.97,85.53 65.95,85.5 62.75,85.5 61.3,86.95 U$10.5
  Bottom 0.3: R10.1 79.25,54.9 v79.25,53.5 79.75,53.5 82.25,56 82.25,57.5 79.38,60.38 79.25,60.5
GND  (via drill 0.35, 1.02)
  Top 0.152: M3:C13.2 107,72.75 M4:C1.2 | M2:C13.2 121.25,75 121.25,73 v120.5,72.25 | M2:J2.3 41.76,8.93 42.58,9.75 43.27,9.75 43.75,9.27 43.75,8.58 43.75,8 44,7.75 46,7.75 v46.25,7.5 v49,7.5 | v47,7.75 47.5,8.25 49,8.25 49.25,8.5 v49.25,11.75 | v49.25,14 49.25,15 49,15.25 47.75,15.25 | M1:C13.2 111.75,49.25 112.75,50.25 v112.88,50.12 | v113.25,53.45 113.25,54 v113.75,54.5 | C1.2 128.65,83.6 v129.05,83.2 | v130.25,78.5 130.87,77.88 S3.LEG1 | v25.75,85.5 v25.75,81 | v34.25,80 v25.75,80 | v25.75,74.5 v25.75,79 | v25.75,72.5 25.75,67.88 M2:C12.2 | M1:C12.2 43.38,66.12 v43,65.75 | v43,61.75 v42.25,61 | v50.25,13 54.75,17.5 M3:C12.2 | v125,70.25 125,71.25 v124.75,71.5 | M4:C13.2 28.75,45 28.75,47.5 29.25,48 32.78,48 34.51,46.27 35.79,46.27 35.93,46.41 35.93,47.59 34.64,48.88 29.62,48.88 M1:U1.48 29,49.23 v28.88,49.1 | v23.75,49.5 25.75,49.5 26.15,49.9 v26.15,50 | v100.5,47 98.75,45.25 98.75,42 97.61,40.86 97.36,40.86
  Top 0.254: U$10.GND 48.31,85.13 59.3,85.13 63.75,80.68 v63.75,76.4
  Top 0.3: U1.90 v60.25,63.25 | U1.99 59.5,58.75 v60.75,60 | M1:U1.24 34.75,61 33.75,60 v33.75,56 | M1:U1.3 33.75,50.5 32.75,51.5 v32.75,54 | M1:U1.30 31.75,58.5 32.75,57.5 v32.75,56 | 37.7,33.05 39.58,34.92 41.08,34.92 v42,34 | 47.86,31.89 47,31.03 44.97,31.03 v43,33 45,31 45,29 43.24,27.24 M2:U1.46 M2:U1.47 M2:U1.48 46.16,26.53 M2:C1.2 | 46.34,33.91 46.1,33.67 46.1,33.66 45.75,33.31 45.5,33.07 44.43,33.07 v44,33.5 | M4:U1.35 v105.25,63.5 | M4:U1.47 M4:U1.48 107,71 v106.25,71 106.25,71.35 M4:C1.2 | M4:U1.47 M4:U1.46 | M3:U1.46 102.28,36.97 | 102.28,36.97 M3:U1.48 | M3:U1.48 102.47,37.78 v101.75,38.5 102.25,39 102.3,39 M3:C10.2 | D4.C v61.5,4 D5.C v61.5,6.25 D1.C | 77.5,63.25 U1.19 | U1.27 77.5,67.25 77.25,67 77.25,66.5 | U1.46 72.5,72.73 72.27,72.5 72.25,72.5 v71.75,72 | U1.37 v77,72 | U1.55 68,72.25 v67.75,72 | U1.61 v65,75 | U1.118 64,53.4 65,54.4 v65,54.5 | U1.127 v68.5,54 | U1.133 v71.5,54 | v69.25,26.5 69.25,26.78 68.4,27.63 U8.13 | R19.1 71.6,24.15 v71.25,24.5 | R4.2 127.8,86.95 v127.75,87 | C1.2 128.65,86.1 v127.75,87 | C3.2 76.9,40.5 v78.25,40.5 77.75,41 R9.2 | U1.11 77.5,59.25 v77.25,59.5 | C2.2 127.75,87.35 | 127.75,87.35 v127.75,87 | R2.2 127.75,87.35 | M3:U1.46 101.48,36.73 | 101.48,36.73 100.22,38 99.25,38 v97.25,36 97.97,36 99.36,34.61 | M3:U1.3 97.36,40.86 98.25,39.97 98.25,39 96.25,37 v96.25,36.5 | M3:U1.35 95.94,34.5 v95.25,34.5 94.4,33.65 | M3:U1.30 94.4,32.5 94.4,33.65 | M3:U1.8 96.25,38.43 96.25,38 v95.75,37.5 | M4:U1.8 102.75,66.5 103.25,66 v103.25,65.5 | M4:U1.40 105.75,66 v105.25,65.5 105.25,69 105.75,69.5 M4:U1.47 | M4:U1.30 105.25,61 104.25,62 v104.25,63.5 | M4:U1.3 103.25,69 104.25,68 v104.25,65.5
  Top 0.3: v103.25,63.5 103.25,59.5 102.25,58.5 M4:U1.24 95.7,58.5 94.65,57.45 93.58,57.45 M4:C2.2 M4:C10.2 | v42.5,35 40.48,37.02 40.48,39.37 M2:U1.24 | M1:U1.8 34.25,53 33.75,53.5 v33.75,54 | v31.75,54 31.75,51 31.25,50.5 M1:U1.46 M1:U1.47 M1:U1.48 34.25,49.5 v35.25,48.5 35.35,48.5 M1:C10.2 | 39.72,31.53 41,32.81 v41,33.5 41.25,33.25 M2:U1.PAD v42.5,32 42.5,30.77 M2:U1.40 | M1:U1.PAD 31.75,54.25 v31.75,54 | M1:U1.40 31.25,53.5 v31.75,54 | M1:U1.35 v31.75,56 | U1.73 58.52,71.75 59.27,71 v60.75,71 | R17.1 67.65,24 v66.5,24 65.35,24 R18.1 | M1:C1.2 42.12,58.88 v42.25,59 | M1:C2.2 v42.25,61 | M2:C2.2 v44,43.5 | v44,43.5 | M2:C10.2 45.5,42 v45.5,42.12 | M3:C2.2 v84.75,37.25 | M3:C1.2 86.77,37.98 v86.25,38.5 | M3:U1.24 89.71,33.65 94.4,33.65 | M3:U1.46 101.48,36.73 | 101.48,36.73 | M2:U1.8 46.34,33.91 | 46.34,33.91 | M3:U1.48 102.28,36.97 | 102.28,36.97 | M3:U1.47 102.28,36.97 | 102.28,36.97 | M3:U1.8 | M2:U1.3 47.86,31.89 | 47.86,31.89 | M3:U1.40 99.36,34.61 | 99.36,34.61 | M2:U1.30 37.7,33.05 | 37.7,33.05 | M2:U1.35 39.72,31.53 | 39.72,31.53
  Top 0.305: M1:U$1.5 v10.25,62 | M2:U$1.5 20.75,27.91 v20.75,28 | M3:U$1.5 107.09,17.75 v106.75,17.75 | v116.25,25.75 118.25,25.75 121.21,28.71 M3:J2.3 | v33.5,8 40,8 M2:J2.3 | M4:U$1.5 v126.25,55 | U1.46 v72.5,79 | U1.55 67.95,73.65 67.95,74.65 67.25,75.35 66.75,75.35 66.4,75 v65,75 | v67.75,72 68.15,71.6 68.5,71.6 68.85,71.25 68.85,70.75 68.75,70.65 v68.75,69 v67.25,69 | v71.75,72 71.75,69.5 v71.87,69.38 71.65,69.15 C17.2 | 77.25,66.5 77.25,63.5 | 77.25,63.5 77.5,63.25 | v73,61 73,58.75 v72.75,58.5 | v74.5,64.5 76.25,64.5 77.25,63.5 | U1.133 71.55,52.35 71.55,51.06 74.75,47.86 74.75,45.25 v75.25,44.75 | v74.5,42.75 74.65,42.75 C3.2 v75.5,40.75 | v75.16,25.66 75.1,25.6 74.5,25.6 73.05,24.15 R19.1 | v69.25,26.5 69.25,25.6 67.65,24 | R18.1 64.1,23.9 v64,24
  Bottom 0.152: v52.25,3.5 51.75,4 51.75,6 | 51.75,6 R37.1 | v50.25,6 51.75,6 | v49,7.5 49.1,7.4 R32.1 | U2.3 46.8,8.45 46.8,8.11 47,7.91 v47,7.75 | v112.88,50.12 112.88,53.12 113.19,53.45 v113.25,53.45 | v129.05,83.2 130.25,82 v130.25,78.5 | v43,65.75 v43,61.75 | v124.75,71.5 124.75,72 120.75,72 v120.5,72.25 | v26.15,50 27.75,50 27.75,48.74 27.72,48.72 27.72,48.28 28.03,47.97 28.47,47.97 28.78,48.28 28.78,48.72 28.75,48.75 28.75,48.98 v28.88,49.1 | M4:C12.2 100.5,49.25 v100.5,47
  Bottom 0.2: U7.3 62.5,18.25 61.75,17.5 v59.75,17.5 59.75,17.15 R21.1
  Bottom 0.254: v63.75,76.4 65,75.15 v65,75 | 72.62,80.12 73.25,80.75
  Bottom 0.3: M4:C9.2 106.25,70.65 v106.25,71 | C16.2 60.9,70.85 v60.75,71 | C18.2 66.5,68.9 67.15,68.9 v67.25,69 | C21.2 76.25,70.5 | C17.2 70.1,69 v68.75,69 | C9.2 61.1,55.15 v60.75,55.5 | C4.2 72.25,58 v72.75,58.5 73.9,58.5 C10.2 | C8.2 76.67,56.92 76.6,57 | C22.2 72.85,80.94 X1.2 73.25,80.75 73.75,80.75 v74.75,81.75 | 72.75,36.85 C47.2 | U12.2 69.75,27 v69.25,26.5 | U11.2 v73.5,28.5 73.75,28.5 74.85,27.4 R14.1 | C48.2 68.9,38.4 v69.25,38.75 | R15.1 66.25,14.4 v66.25,14 | C44.2 62.9,24.85 | M3:C9.2 101,38.5 v101.75,38.5 | C11.2 63.35,58.5 v65.25,58.5 | C6.2 64,57.25 v65.25,58.5 | C7.2 65.25,57.85 v65.25,58.5 | M1:C9.2 41.25,53 41.77,53.52 v43.23,53.52 | M2:C9.2 50.17,36.12 v51,36.12 | M3:C9.2 | U2.3 46.5,7.75 v46.25,7.5 | R32.1 v50.25,6 | R37.1 53.1,6.15 v53.25,6
  Bottom 0.305: v10.25,62 10.25,59 8,56.75 8,41.25 8.9,40.35 M1:J2.3 | v106.75,17.75 114.75,25.75 v116.25,25.75 | v20.75,28 26.5,22.25 26.5,14.5 29,12 29,10.89 31.89,8 v33.5,8 | v126.25,55 130,51.25 130,40 129.1,39.1 M4:J2.3 | v72.5,79 72.5,80 72.62,80.12 | v71.87,69.38 72.12,69.13 72.48,69.13 C19.2 73.5,69.15 C15.2 | C15.2 C13.2 74.4,64.6 v74.5,64.5 74.5,61.35 C12.2 v73,61 | C15.2 74.4,68.65 76.25,70.5 | C18.2 C20.2 64,69 | 64,69 64,67.65 C14.2 | C16.2 62.15,70.85 64,69 | v77,72 76.1,71.1 C21.2 | v77.25,59.5 76.58,59.5 76.53,59.55 75.7,59.55 74.5,60.75 | C10.2 74.15,57.2 C5.2 76.6,56.85 76.67,56.92 | C4.2 71.45,56.05 71.45,54.48 71.5,54.42 v71.5,54 v68.5,54 68.5,54.6 C7.2 | v60.25,63.25 60.25,60.5 v60.75,60 61.85,60 C11.2 | C9.2 62.3,55.15 C6.2 65,55.85 v65,54.5 | v75.25,44.75 75.25,43.5 v74.5,42.75 | v75.5,40.75 72.75,38 72.75,36.85 | v69.25,26.5 v71.25,24.5 | R14.1 75,26.35 75,25.75 75.09,25.66 v75.16,25.66 75.31,25.66 J6.2 | 62.9,24.85 63.75,24 | v64,24 63.75,24 | 63.75,24 v63.25,23.5 63.8,22.95 U7.12 64.5,21.95 U7.13 66.4,21.75 C41.2
  other vias: 32.25,55 33.25,55 23.75,62.5 23.75,60.5 23.75,61.5 22.75,61 22.75,62 23.75,56 23.75,54 23.75,55 22.75,54.5 22.75,55.5 23.75,48.5 23.75,47.5 22.75,48 22.75,49 35,80 43,34 42,33 25.75,87.5 24.75,87 25.75,86.5 24.75,86 24.75,80.5 24.75,79.5 25.75,73.5 24.75,73 24.75,74 103.75,64.5 104.75,64.5 112.75,69 112.75,68 113.75,67.5 113.75,68.5 113.75,69.5 113.75,63 112.75,62.5 113.75,62 112.75,61.5 113.75,61 113.75,56.5 112.75,56 113.75,55.5 112.75,55 96.25,35.5 95.25,36.5 95.25,35.5 94.25,35.5 97.75,27.5 98.5,27.25 97.75,26.5 96.75,26.5 97,25.75 101.25,30.5 101.1,31.3 102,31.25 101.75,32 102.75,32 105.75,35 105.6,35.9 106.6,35.6 106.25,36.5 107.25,36.5 126,70.25 127,70.25 128,70.25 129,70.25 130,70.25 33,33.12 33.25,34 34.75,32.5 34,33.25 33.88,32.25 38.75,27.88 38,28.5 37.88,27.75 38.62,27 39.38,27.12 43.12,22.62 43.25,23.5 44.12,22.75 44.75,22 43.88,21.88 49.75,13.5 49.25,13 70.25,69.15
  pour Top (no thermals): 31,50 31,60.5 34.5,60.5 34.5,50
  pour Top (no thermals): 20.75,63 24.25,63 24.25,60.25 20.75,60.25
  pour Top (no thermals): 20.75,56.5 24.25,56.5 24.25,53.75 20.75,53.75
  pour Top (no thermals): 20.75,50 24.25,50 24.25,47.25 20.75,47.25
  pour Top (no thermals): 33,79 33,81 36.5,81 36.5,79
  pour Top (no thermals): 38,35.5 45,28.5 47.5,31 40.5,38
  pour Top (no thermals): 22.75,88 26.25,88 26.25,85 22.75,85
  pour Top (no thermals): 22.75,81.5 26.25,81.5 26.25,78.5 22.75,78.5
  pour Top (no thermals): 22.75,75 26.25,75 26.25,72 22.75,72
  pour Top (no thermals): 102.5,59 102.5,69.5 106,69.5 106,59
  pour Top (no thermals): 115.75,69.75 112.25,69.75 112.25,67 115.75,67
  pour Top (no thermals): 115.75,63.25 112.25,63.25 112.25,60.5 115.75,60.5
  pour Top (no thermals): 115.75,56.75 112.25,56.75 112.25,54 115.75,54
  pour Top (no thermals): 90.31,32.94 98.06,40.69 100.5,38.25 92.75,30.5
  pour Top (no thermals): 98.25,24 96,26.25 98,28.25 100.25,26
  pour Top (no thermals): 107.25,33 104.75,35.5 106.75,37.5 109.25,35
  pour GND (isolate 0.4, no thermals): 0.25,91.5 0.25,35 34.88,0.38 104,0.38 136.25,32.62 136.25,91.5 121.64,106.11 14.86,106.11
  pour Top (no thermals): 122.25,73.5 129.75,73.5 129.75,78 131.75,78 131.75,69.5 122.25,69.5
  pour Top (no thermals): 47.75,5 53.25,5 53.25,1 47.75,1
  pour Bottom (no thermals): 63.75,21.2 67.25,21.2 67.25,22.5 66.25,22.5 63.75,25 62.75,25 62.75,23 63.75,23
  pour Top (no thermals): 30.25,31.5 33.25,34.5 35.25,32.5 32.25,29.5
  pour Top (no thermals): 39.88,26.62 37.75,24.5 35.5,26.75 38,29.25 39.88,27.38
  pour Top (no thermals): 45.5,22.25 42.75,19.5 40.75,21.5 43.5,24.25
  pour Top (no thermals): 102.75,28.5 104.88,30.62 102.38,33.12 100.25,31
  pour Bottom (no thermals): 49.25,10.62 47.62,10.62 47.62,12.38 47.62,12.62 47,13.25 47,14.75 49,14.75 51.25,12.5 51.25,11.25 50,11.25 49.88,11.25
LED-M3  (via drill 0.35)
  Top 0.3: D12.C 119.23,33.48 v118.75,33
  Bottom 0.3: 103.25,2 117.75,16.5 117.75,24 117.12,24.62 117.12,31.38 v118.75,33
LED-M4  (via drill 0.35)
  Top 0.3: v124.75,36 D11.C
M1-!CS
  Top 0.3: M1:U1.4 37.77,51 38.13,50.63 41.7,50.63 44.75,53.68 44.75,54.5 49.35,59.1 RN5.13
M1-A-H
  Top 0.3: RN5.9 48.78,62.3 42.98,56.5 M1:U1.15
M1-A-L
  Top 0.3: RN6.16 49.29,63.45 42.84,57 M1:U1.16
M1-B-H
  Top 0.3: RN5.11 48.45,60.7 43.25,55.5 M1:U1.13
M1-B-L
  Top 0.3: RN5.10 48.61,61.5 43.11,56 M1:U1.14
M1-C-H
  Top 0.3: RN6.14 51.9,65 50.2,65 42.7,57.5 M1:U1.17
M1-C-L
  Top 0.3: RN6.13 50.42,65.85 42.57,58 M1:U1.18
M1-ENC-A
  Top 0.3: RN5.14 50.91,58.3 35.11,42.5 28.61,42.5 22.11,35.99 17.3,35.99 11,42.35 M1:J2.2
M1-ENC-B  (via drill 0.35)
  Top 0.3: M1:J2.1 17.73,36.55 21.8,36.55 23.25,38 28.25,43 34.7,43 48.75,57.05 v48.75,57.5 | v48.75,59.5 49.15,59.9 RN5.12
  Bottom 0.3: v48.75,57.5 v48.75,59.5
M1-H1  (via drill 0.35)
  Top 0.3: RN6.10 51,68.25 v50.75,68.5 | v47,66.75 47,65.89 46.26,65.15 25.87,65.15 24.17,66.85